# Altium PCB RFID_CC1101_433MHz.PcbDoc
Units mil, origin at the board's own origin, x right, y up, seen from the top; angles counter-clockwise.
Board outline 2125.98 x 2362.21 mil, 4 copper layers (Top Layer, GND Plane, POWER Plane, Bottom Layer), stack 16.312 mil thick; 97 components, 73 nets, 288 pads, 161 vias.
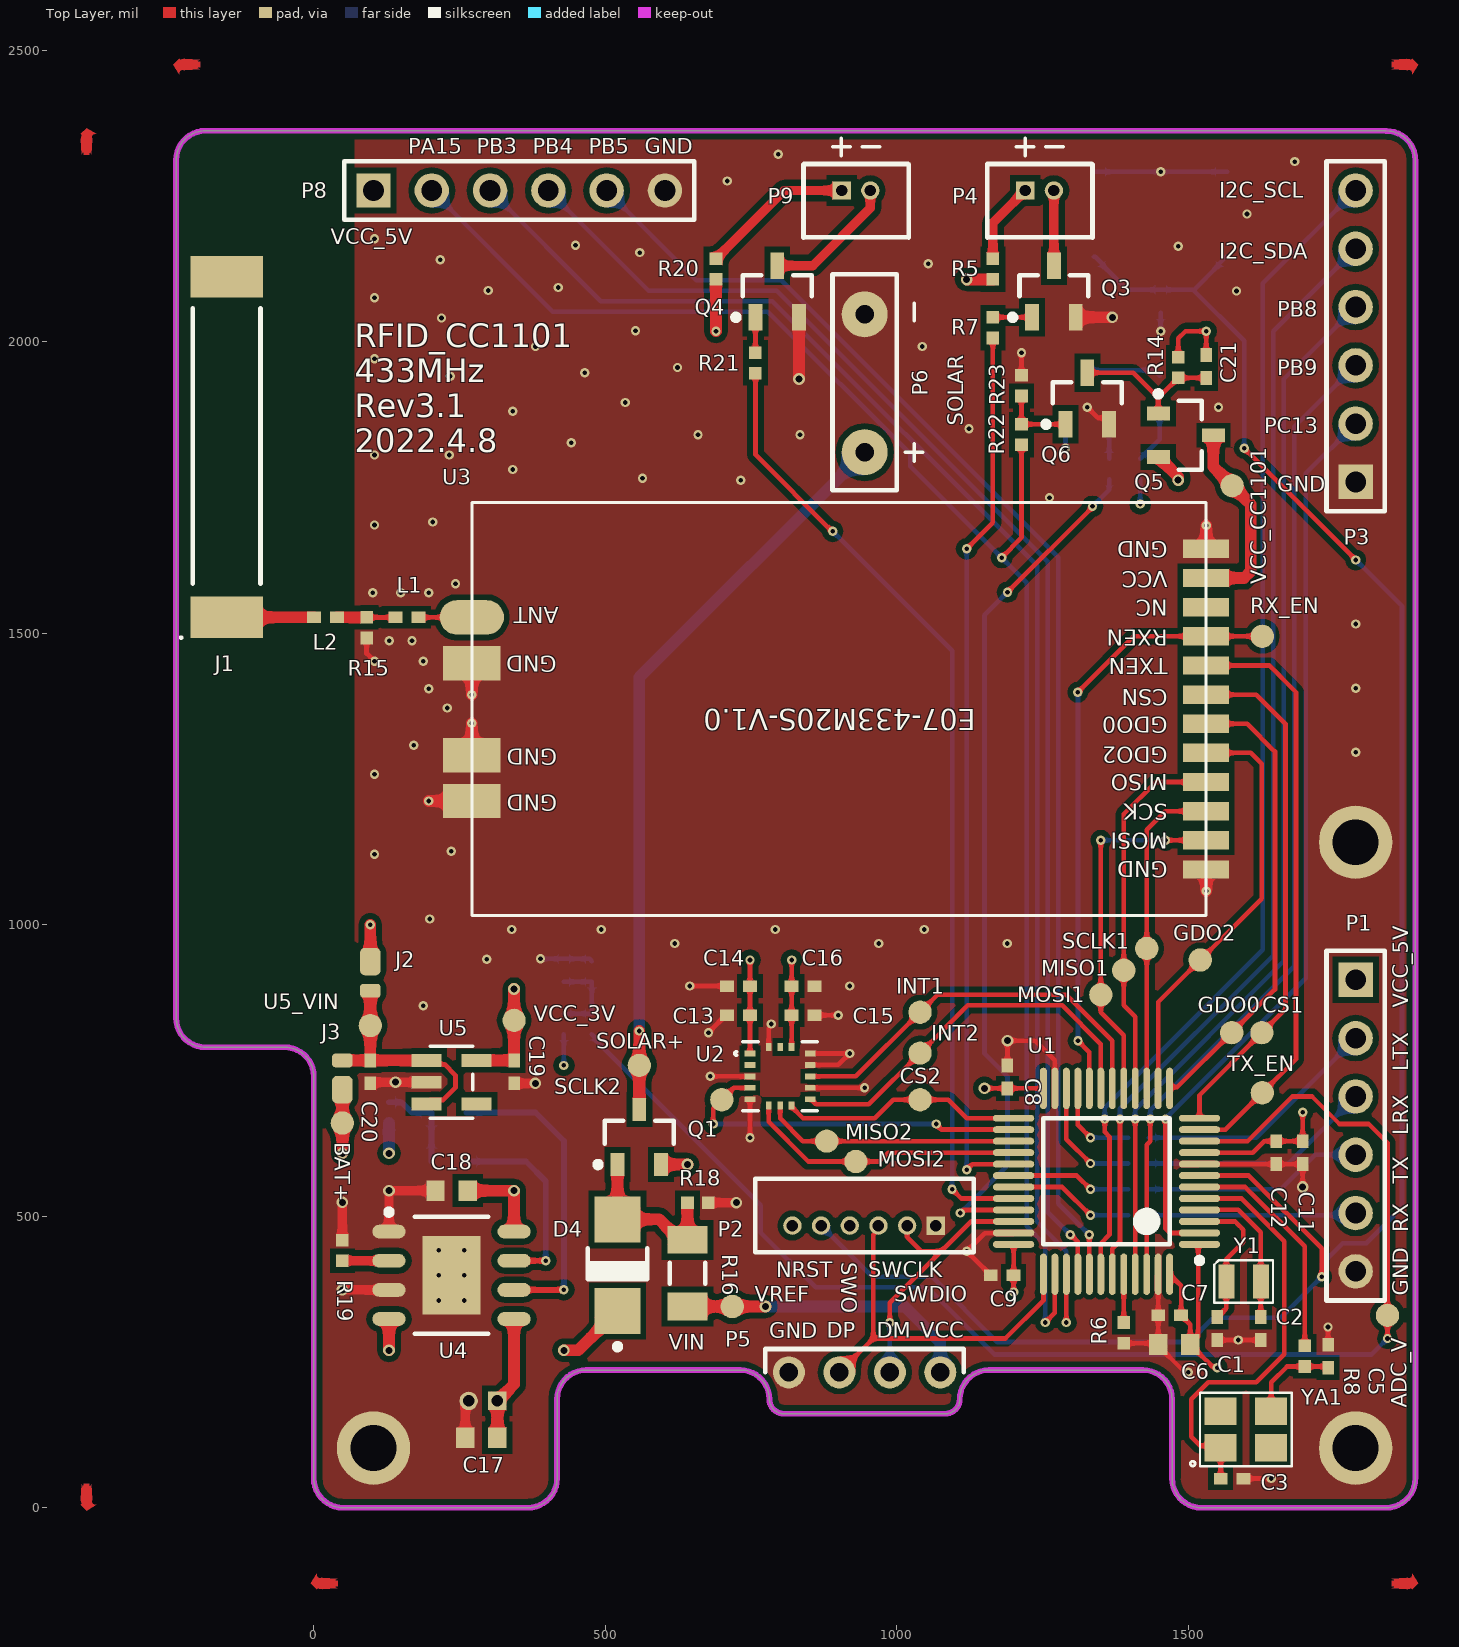
[diagram p0: Top Layer view]
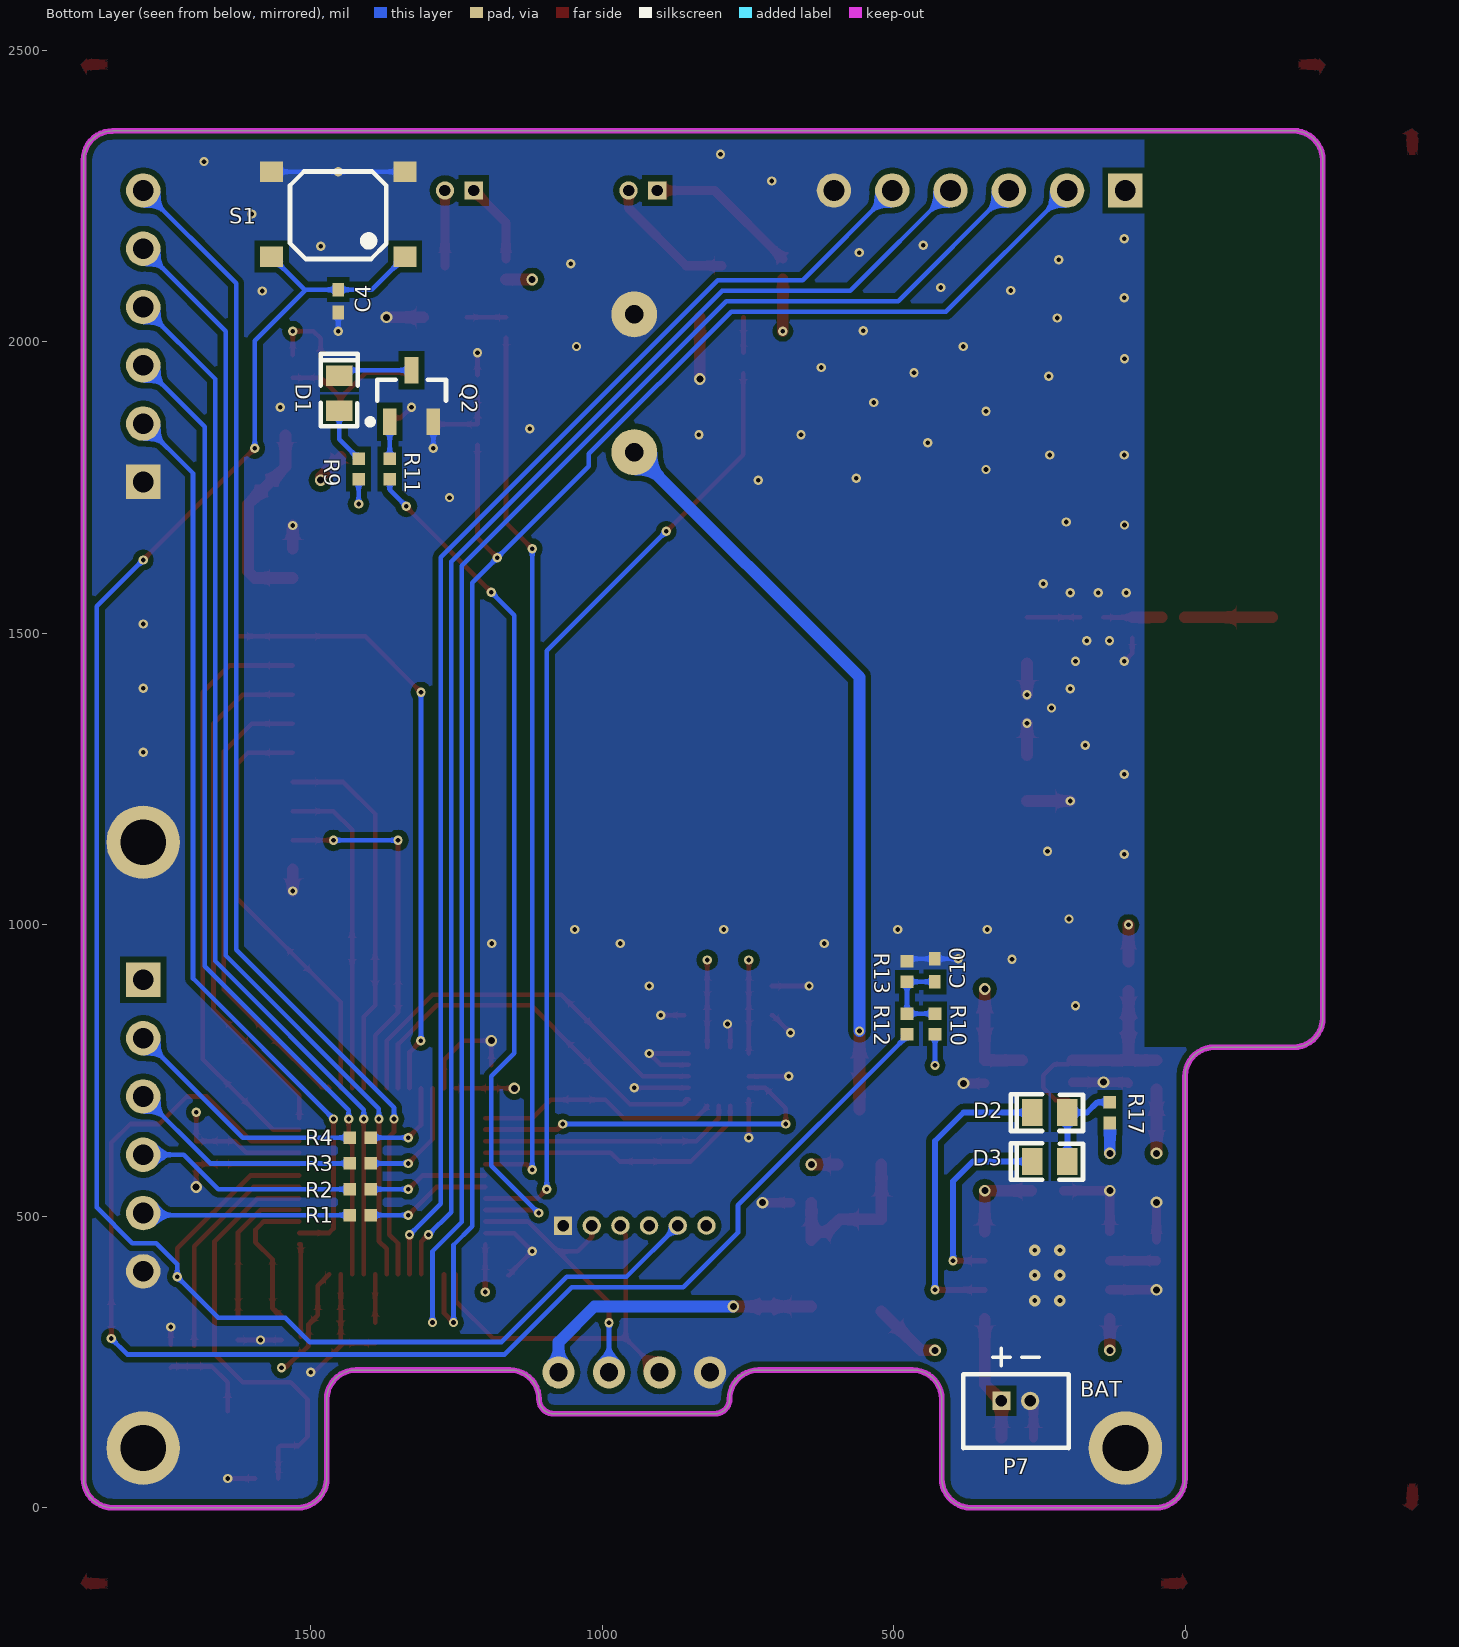
[diagram p1: Bottom Layer view, seen from below]
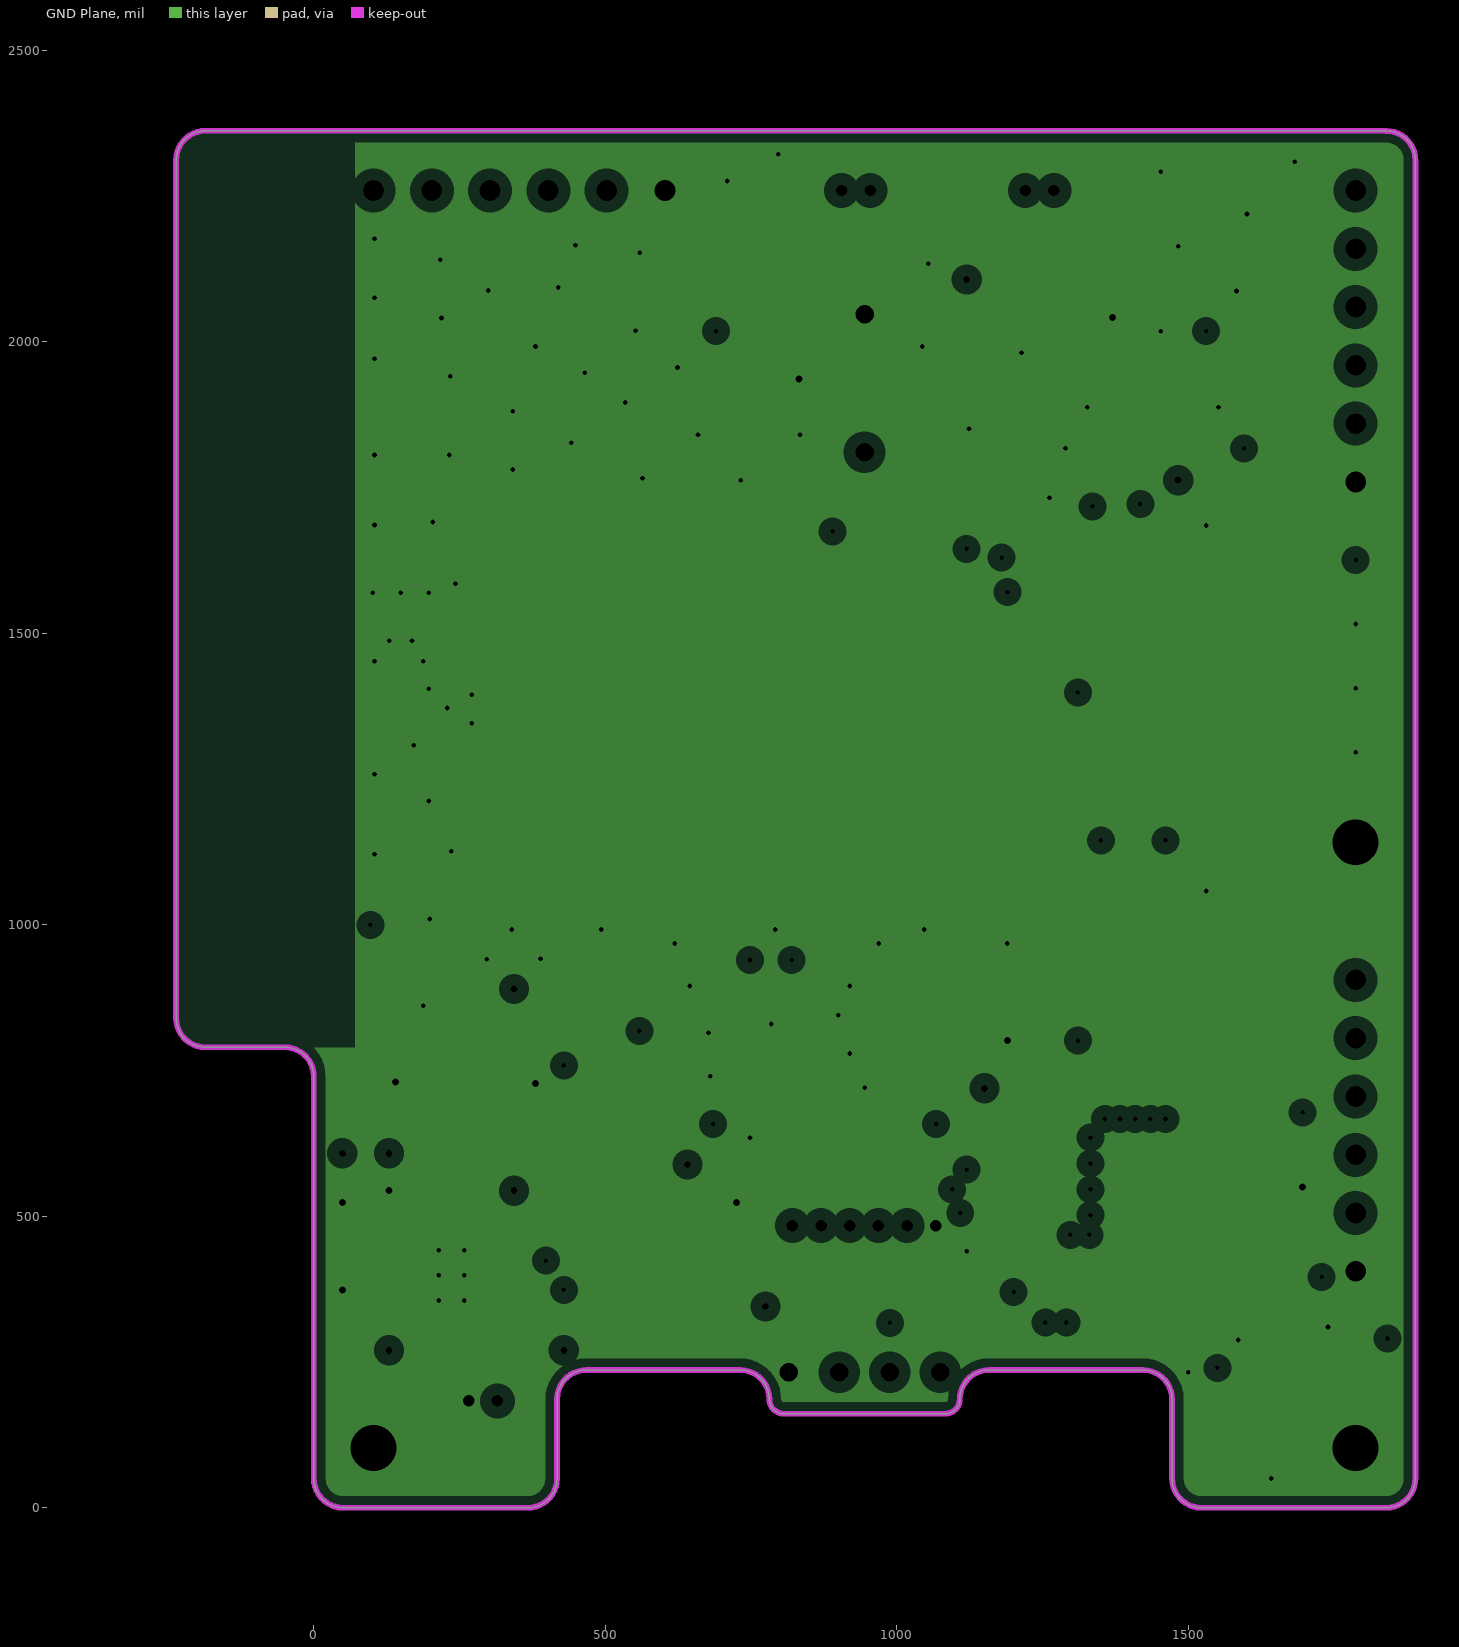
[diagram p2: GND Plane, clearances drawn from the general rule]
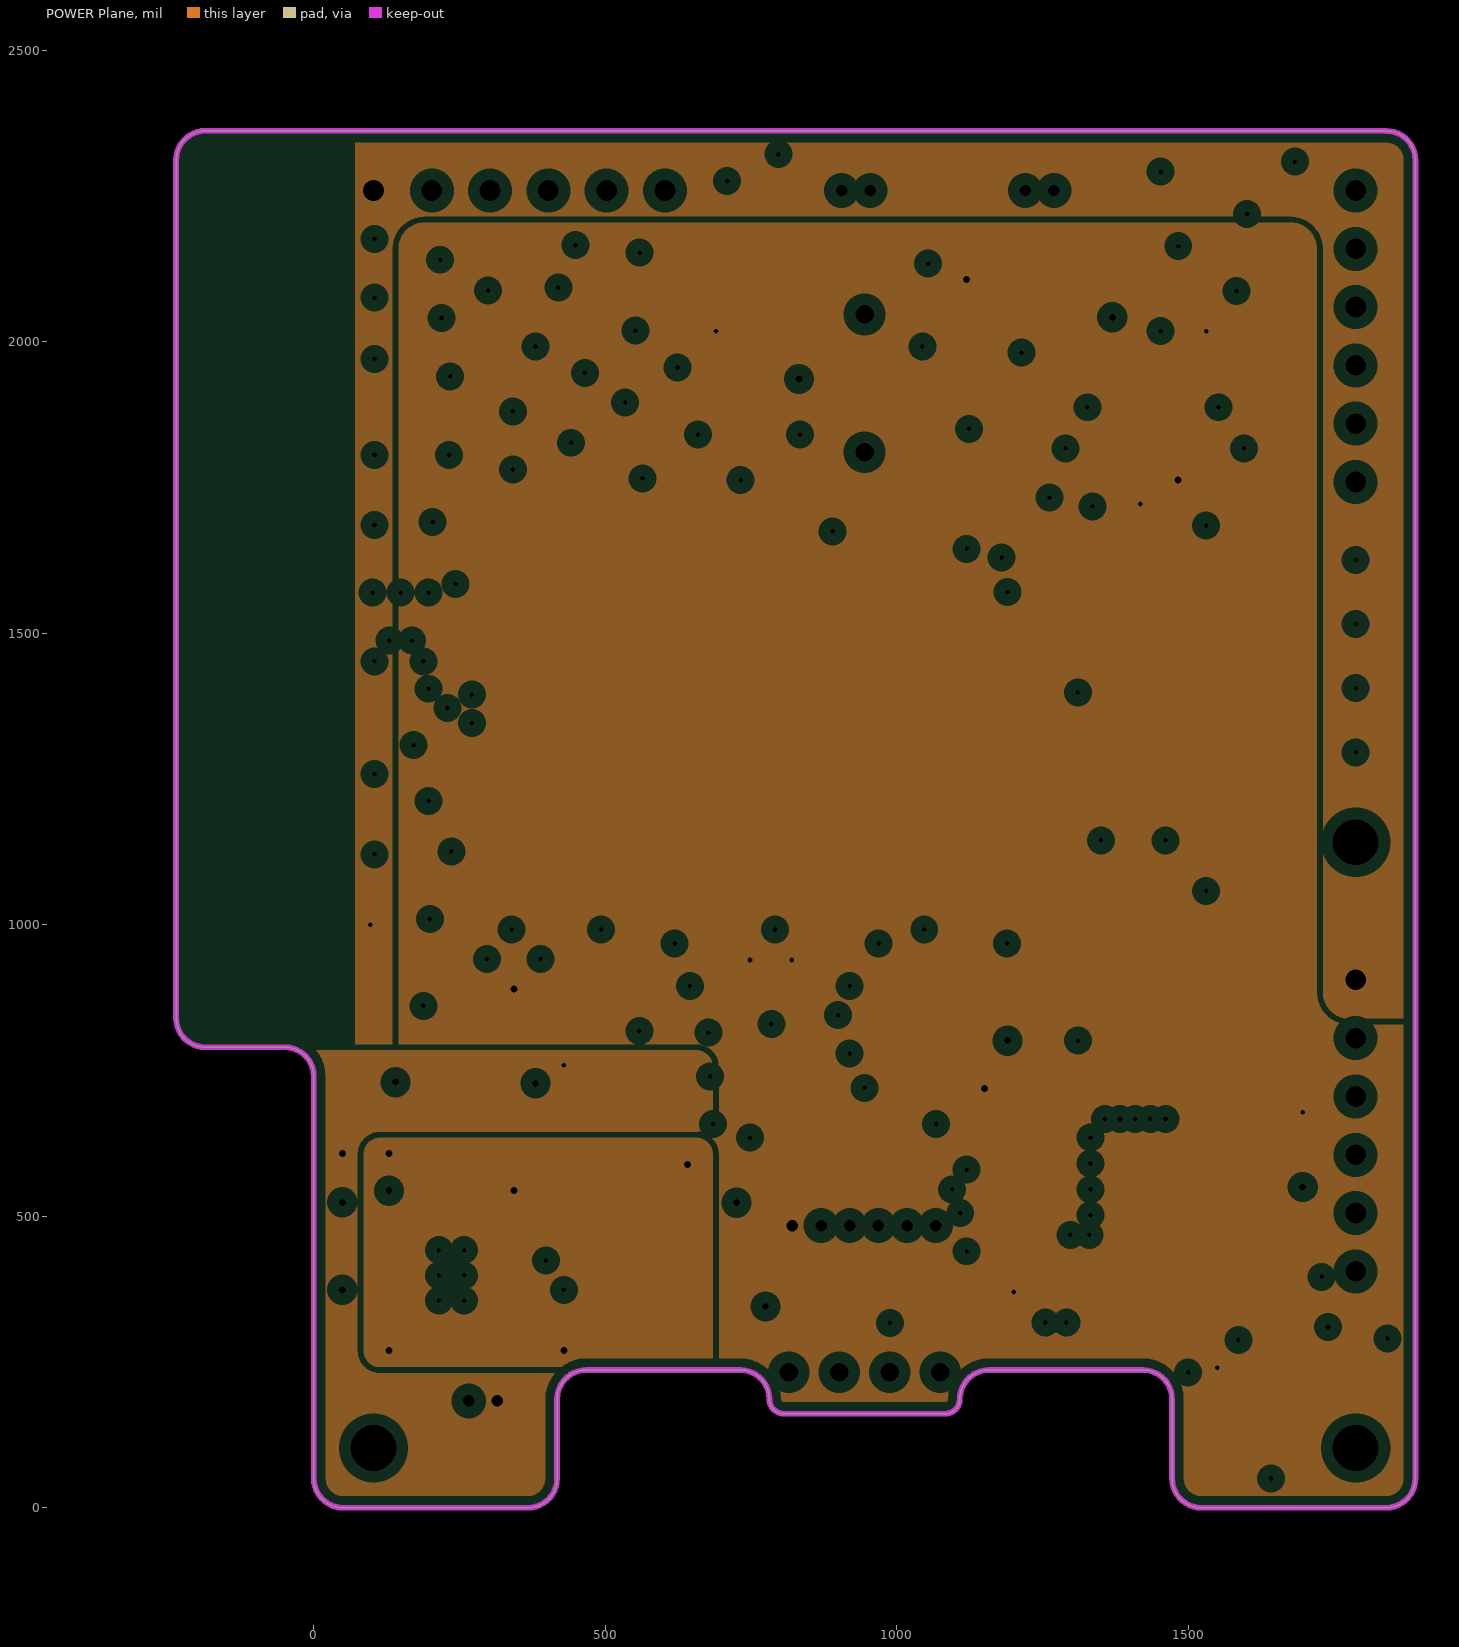
[diagram p3: POWER Plane, clearances drawn from the general rule]
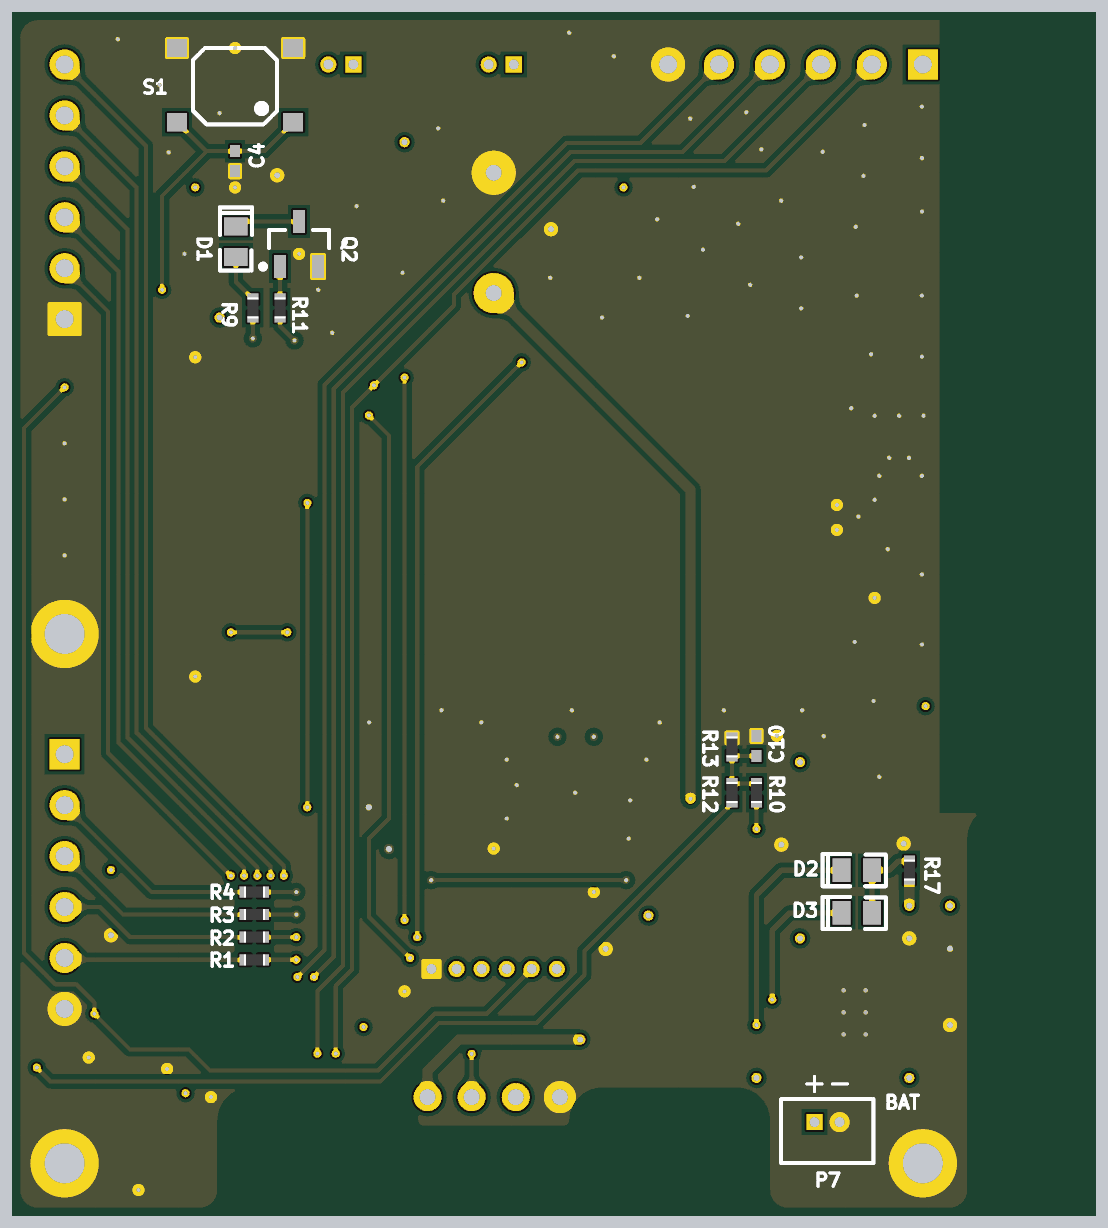
[diagram p4: 3D render of the assembled board from below, using the file's embedded part models]

## Layer stack, top to bottom
Top Solder: solder mask 0.4, Solder Resist, Dk 3.5
Top Layer: signal copper 1.3779
Dielectric 1: core 4, Core-009, Dk 4.5
GND Plane: plane copper 1.3779, net GND
Dielectric 3: prepreg 2.8, PP-006, Dk 4.1
POWER Plane: plane copper 1.3779, net (Multiple Nets)
Dielectric 2: core 4, Core-009, Dk 4.5
Bottom Layer: signal copper 1.3779
Bottom Solder: solder mask 0.4, Solder Resist, Dk 3.5

## Board outline
50,0 367.32,0 ccw(c367.32,50) 417.32,50 417.32,186.22 cw(c467.32,186.22) 467.32,236.22 731.5,236.22 cw(c731.5,186.22) 781.5,186.22 ccw(c806.5,186.22) 806.5,161.22 1083.27,161.22 ccw(c1083.27,186.22) 1108.27,186.22 cw(c1158.27,186.22) 1158.27,236.22 1422.44,236.22 cw(c1422.44,186.22) 1472.44,186.22 1472.44,50 ccw(c1522.44,50) 1522.44,0 1839.76,0 ccw(c1839.76,50) 1889.76,50 1889.76,2312.09 ccw(c1839.88,2312.21) 1840,2362.09 1840,2362.2 -186.22,2362.2 ccw(c-186.22,2312.2) -236.22,2312.2 -236.22,840 ccw(c-186.22,840) -186.22,790 -50,790 cw(c-50,740) 0,740 0,50 ccw(c50,50)

## Design rules (kind name [scope] priority, off if disabled: settings)
Clearance Clearance_8mil [(IsPad and InComponent('U1')) or (IsPad and InComponent('U2'))] p1: gap=8 ignorepadtopadclearanceinfootprint=TRUE
Clearance [All] p2: gap=10 ignorepadtopadclearanceinfootprint=FALSE except(0: Arc-Hole Track-Hole SMDPad-Hole THPad-Hole Via-Hole Fill-Hole Poly-Hole Region-Hole Text-Hole)
MinimumSolderMaskSliver [All] p1: minsoldermaskwidth=1
PlaneClearance [All] p1: clearance=20
PlaneConnect [All] p1: planeconnectstyle=Direct reliefexpansion=20 reliefentries=4 reliefconductorwidth=10 reliefairgap=10
PolygonConnect [All] p1: connectstyle=Direct reliefconductorwidth=10 reliefentries=4 polygonreliefangle="90 Angle" airgapwidth=10
RoutingVias [All] p1: holewidth=12 width=20 viastyle="Through Hole" minholewidth=8 minwidth=16 maxholewidth=28 maxwidth=50
SilkToSilkClearance [All] p1: silktosilkclearance=5
SilkToSolderMaskClearance [IsPad] p1: minsilkscreentomaskgap=0 clearancetoexposedcopper=TRUE
SolderMaskExpansion [All] p1: expansion=4 istentingtop=FALSE
Width Width_LED [InNetClass('led class')] p1: maxlimit=20 minlimit=8 preferedwidth=16
Width "Width Power" [InNetClass('power class')] p2: maxlimit=20 minlimit=8 preferedwidth=20
Width [All] p3: maxlimit=40 minlimit=8 preferedwidth=10
25 further rules are at their usual default settings.

## Classes and differential pairs
net class "led class": NetP4_1 NetP4_2 NetP9_1 NetP9_2
net class "power class": BAT+ GND NetC20_2 NetP4_2 NetP5_1 NetR19_2 SOLAR+ VCC VCC_3V VCC_5V
component class Power: BAT+ C17 C18 C19 C20 D2 D3 D4 J2 J3 P5 P6 P7 Q1 R16 R17 R18 R19 SOLAR+ U4 U5 U5_VIN VCC_3V VIN
component class MEMS&RF: C13 C14 C15 C16 J1 L2 R15 U2 U3
component class MCU: ADC_V C1 C2 C3 C4 C5 C6 C7 C8 C9 C10 C11 C12 CS1 CS2 D1 GDO0 GDO2 INT1 INT2 MISO1 MISO2 MOSI1 MOSI2 P1 P2 P3 P4 P8 P9 Q2 Q3 Q4 R1 R2 R3 R4 R5 R6 R7 R8 R9 R10 R11 R12 R13 R20 R21 RX_EN S1 SCLK1 SCLK2 TX_EN U1 Y1 YA1

## Components (designator, comment, footprint, x,y, rotation, side; value= is the part's Value field where it differs from the comment)
ADC_V "TP-EMB-SMT-Single-20mil-1pin" EMB-SMT-40MILX40MIL 1842,330 r90 top
BAT+ "TP-EMB-SMT-Single-20mil-1pin" EMB-SMT-40MILX40MIL 49,660 r90 top
C1 "10pF" 0402 1550,307.3 r90 top
C2 "10pF" 0402 1624.63,307.3 r90 top
C3 "18pF" 0402 1575.49,50 r180 top
C4 "100nF" 0402 1452.76,2070 r90 bottom
C5 "18pF" 0402 1740,260 r270 top
C6 "10uF" 1608[0603] 1476.14,280 r0 top
C7 "100nF" 0402 1468.27,330 r0 top
C8 "100nF" 0402 1190,739.13 r270 top
C9 "100nF" 0402 1180.87,398.74 r0 top
C10 "100nF" 0402 429,921.97 r270 bottom
C11 "1uF" 0402 1696.4,609.21 r90 top
C12 "100nF" 0402 1651.18,609.21 r90 top
C13 "100nF" 0402 728.64,845 r180 top
C14 "1uF" 0402 728.64,895 r180 top
C15 "100nF" 0402 839.38,845 r0 top
C16 "1uF" 0402 839.38,895 r180 top
C17 "10uF" 1608[0603] 287.4,120 r0 top
C18 "10uF" 1608[0603] 236.22,544 r180 top
C19 "1uF" 0402 343.5,747.72 r90 top
C20 "1uF" 0402 96.99,747.72 r90 top
C21 "100nF" 0402 1530.92,1958.02 r270 top
CS1 "TP-EMB-SMT-Single-20mil-1pin" EMB-SMT-40MILX40MIL 1626.55,815 r90 top
CS2 "TP-EMB-SMT-Single-20mil-1pin" EMB-SMT-40MILX40MIL 1040,700 r90 top
D1 "Green" 0603/K 1451,1882 r90 bottom
D2 "Green" 0603/K 201.84,677.85 r0 bottom
D3 "Red" 0603/K 201.84,593.98 r0 bottom
D4 "SS24A" ONSC-SMA-2-403D-02_V 521,416.03 r90 top
GDO0 "TP-EMB-SMT-Single-20mil-1pin" EMB-SMT-40MILX40MIL 1574.73,815 r90 top
GDO2 "TP-EMB-SMT-Single-20mil-1pin" EMB-SMT-40MILX40MIL 1520.69,939.69 r90 top
INT1 "TP-EMB-SMT-Single-20mil-1pin" EMB-SMT-40MILX40MIL 1040,850 r90 top
INT2 "TP-EMB-SMT-Single-20mil-1pin" EMB-SMT-40MILX40MIL 1040,780 r90 top
J1 "CA-S01" CA-S01 -149.61,1821.77 r90 top
J2 "NC" "1608[0603] - JUMPER" 96.99,917.06 r270 top
J3 "0Ω" "1608[0603] - JUMPER" 49,737.4 r90 top
L1 "18nH" 0402 160,1527.48 r180 top
L2 "100nH" 0402 20,1527.48 r180 top
MISO1 "TP-EMB-SMT-Single-20mil-1pin" EMB-SMT-40MILX40MIL 1389.53,922 r90 top
MISO2 "TP-EMB-SMT-Single-20mil-1pin" EMB-SMT-40MILX40MIL 880,629 r90 top
MOSI1 "TP-EMB-SMT-Single-20mil-1pin" EMB-SMT-40MILX40MIL 1350.16,880 r90 top
MOSI2 "TP-EMB-SMT-Single-20mil-1pin" EMB-SMT-40MILX40MIL 930,593.98 r90 top
P1 "A2541WV-6P" A2541WV-6P 1787.4,905.51 r270 top
P2 "A1251WV-6P" A1251WV-6P-SWD 1067.09,484 r180 top
P3 "A2541WV-6P" A2541WV-6P 1787.4,1759.84 r90 top
P4 "A1251WV-2P" A1251WV-2P 1220.47,2259.84 r0 top
P5 "LBX0062A" LBX0062A 1074.8,232.28 r180 top
P6 "SOLAR-PAD" SOLAR-PAD 944.88,1811.02 r90 top
P7 "A1251WV-2P" A1251WV-2P 314.96,183.23 r180 bottom
P8 "A2541WV-6P" A2541WV-6P 102.36,2259.84 r0 top
P9 "A1251WV-2P" A1251WV-2P 905.51,2259.84 r0 top
Q1 "YJL2301CQ" SOT95P237X112-3N 558.39,635.98 r90 top
Q2 "S8050" SOT-23B_N 1327,1907.31 r90 bottom
Q3 "S8050" SOT-23B_N 1269.68,2086.61 r90 top
Q4 "S8050" SOT-23B_N 795,2086.61 r90 top
Q5 "YJL2301CQ" SOT95P237X112-3N 1496,1840 r0 top
Q6 "S8050" SOT-23B_N 1327,1903.06 r90 top
R1 "33" RESC1005X04N 1415,502 r0 bottom
R2 "33" RESC1005X04N 1415,546.33 r180 bottom
R3 "33" RESC1005X04N 1415,590.67 r0 bottom
R4 "33" RESC1005X04N 1415,635 r0 bottom
R5 "1k" RESC1005X04N 1165,2125 r270 top
R6 "10k" RESC1005X04N 1389.53,300 r270 top
R7 "1k" RESC1005X04N 1165,2024.61 r90 top
R8 "390" RESC1005X04N 1700,260 r90 top
R9 "10k" RESC1005X04N 1417.85,1782 r270 bottom
R10 "1M" RESC1005X04N 429,830 r270 bottom
R11 "1k" RESC1005X04N 1364.4,1782 r90 bottom
R12 "0Ω" RESC1005X04N 477,830 r90 bottom
R13 "1M" RESC1005X04N 477,920.01 r270 bottom
R14 "100k" RESC1005X04N 1483,1956.05 r90 top
R15 "NC" RESC1005X04N 90.49,1509.76 r90 top
R16 "0.4" RESC3216X07N 641,402.28 r90 top
R17 "1k" RESC1005X04N 128.94,677.85 r90 bottom
R18 "10k" RESC1005X04N 658.72,523.32 r180 top
R19 "1.2k" RESC1005X04N 49,441.46 r270 top
R20 "1k" RESC1005X04N 690,2125 r270 top
R21 "1k" RESC1005X04N 757.6,1964 r90 top
R22 "2k" RESC1005X04N 1214,1841.05 r90 top
R23 "10k" RESC1005X04N 1214,1925 r270 top
RX_EN "TP-EMB-SMT-Single-20mil-1pin" EMB-SMT-40MILX40MIL 1627.31,1495 r90 top
S1 "DPST-4" DPST 1338.58,2146.39 r0 bottom
SCLK1 "TP-EMB-SMT-Single-20mil-1pin" EMB-SMT-40MILX40MIL 1428.9,959.47 r90 top
SCLK2 "TP-EMB-SMT-Single-20mil-1pin" EMB-SMT-40MILX40MIL 700,700 r90 top
SOLAR+ "TP-EMB-SMT-Single-20mil-1pin" EMB-SMT-40MILX40MIL 558.4,758.82 r90 top
TX_EN "TP-EMB-SMT-Single-20mil-1pin" EMB-SMT-40MILX40MIL 1627.31,711.94 r90 top
U1 "STM32L051C8T6" STM-LQFP48_N 1360,560 r180 top
U2 "ADXL362BCCZ" LGA_CC-16-4 800,740 r0 top
U3 "E07-433M20S" PE07-433M20S 901,1370 r180 top
U4 "TP4056" ESOP-9N 236.22,398.74 r0 top
U5 "ADP151AUJZ-3.0-R7" UJ_5 236.22,730 r0 top
U5_VIN "TP-EMB-SMT-Single-20mil-1pin" EMB-SMT-40MILX40MIL 96.99,827.23 r90 top
VCC_3V "TP-EMB-SMT-Single-20mil-1pin" EMB-SMT-40MILX40MIL 343.5,836.06 r90 top
VCC_CC1101 "TP-EMB-SMT-Single-20mil-1pin" EMB-SMT-40MILX40MIL 1575.43,1753.57 r90 top
VIN "TP-EMB-SMT-Single-20mil-1pin" EMB-SMT-40MILX40MIL 717.94,345.2 r90 top
Y1 "32.768 kHz" XTAL-2012 1565.58,388.12 r0 top
YA1 "12.0000000MHz" XTAL-SMT-4P 1555.8,102.66 r0 top

## Footprints (in the part's own frame and the unit in brackets; to place one, negate y for a bottom-side part, rotate by r counter-clockwise, add the part's x,y. Pads: shape width x height; smd on the part's side, far side on the other; paste and mask are expansions set on the pad)
0402 [mm] "Chip Capacitor, Body 1.0x0.5mm, IPC High Density"
  rect 0.6x0.5 smd: 1(-0.5,0) 2(0.5,0)
  body extent -0.55,-0.3 0.55,0.3, height 1.3
0603/K [mil]
  rect 35x46 smd: A(0,0) K(60,0)
  silkscreen extent -27,-31 97,31
1608[0603] [mm] "Chip Capacitor, Body 1.6x0.8mm, IPC High Density"
  rect 0.8x0.9 smd: 1(-0.7,0) 2(0.7,0)
  body extent -0.87,-0.48 0.87,0.48, height 1.3
"1608[0603] - JUMPER" [mm] "jumper, Body 1.6x0.8mm, IPC High Density"
  rrect50% 1.2x0.9 smd: 1(-0.508,0)
  rrect50% 0.6x0.9 smd: 2(0.762,0)
  body extent -0.87,-0.48 0.87,0.48, height 1.3
A1251WV-2P [mm] "Connector; Header; 2 Position"
  rect 0.8x0.8 hole 0.5: 1(0,0)
  round 0.8 hole 0.5: 2(1.25,0)
  silkscreen extent -1.66,-2.05 2.93,2.29
A1251WV-6P-SWD [mm] "Connector; Header; 6 Position"
  rect 0.8x0.8 hole 0.5: 1(0,0)
  round 0.8 hole 0.5: 2(1.25,0) 3(2.5,0) 4(3.75,0) 5(5,0) 6(6.25,0)
  silkscreen extent -1.66,-2.05 7.87,1.15
A2541WV-6P [mm] "Connector; Header; 6 Position"
  rect 1.5x1.5 hole 0.9: 1(0,0)
  round 1.5 hole 0.9: 2(2.54,0) 3(5.08,0) 4(7.62,0) 5(10.16,0) 6(12.7,0)
  silkscreen extent -1.27,-1.27 13.97,1.27
CA-S01 [mm] "CorssAir Antenna, 2-Leads, Body 15.00x3.00mm, IPC Medium Density"
  rect 1.8x3.15 smd: 1(-7.475,0) 2(7.375,0)
  silkscreen extent -8.41,-1.47 6,2.03, body extent -7.6,-1.55 7.6,1.55, height 0.25
DPST [mm]
  rect 1x0.9 smd: 1(0,0) 2(5.8,0) 3(0,-3.7) 4(5.8,-3.7)
  silkscreen extent 0.81,-3.71 5,0.1
EMB-SMT-40MILX40MIL [mil] "testpoint"
  round 40 smd: 1(0,0)
ESOP-9N [mm] "ESOP, 8-Leads, Body 4.90x3.90mm, Pitch 1.27mm, Thermal Pad 3.41x2.52mm, IPC Medium Density, For TP4056"
  oval 1.45x0.6 smd: 1(-2.725,1.905) 2(-2.725,0.635) 3(-2.725,-0.635) 4(-2.725,-1.905) 5(2.725,-1.905) 6(2.725,-0.635) 7(2.725,0.635) 8(2.725,1.905)
  rect 2.52x3.41 smd: 9(0,0)
  silkscreen extent -2.85,-2.55 1.6,2.88, body extent -3,-2.55 3,2.55, height 1.75
LBX0062A [mm] "PogoPin; Connector; 4 Position"
  round 1.4 hole 0.8: 1(0,0) 2(2.2,0) 3(4.4,0) 4(6.6,0)
  silkscreen extent -1.02,-1.02 7.62,0
LGA_CC-16-4 [mm]
  rect 0.475x0.25 smd: 1(-1.313,1) 2(-1.313,0.5) 3(-1.313,0) 4(-1.313,-0.5) 5(-1.313,-1) 9(1.313,-1) 10(1.313,-0.5) 11(1.313,0) 12(1.313,0.5) 13(1.313,1)
  rect 0.25x0.35 smd: 6(-0.5,-1.275) 7(0,-1.275) 8(0.5,-1.275) 14(0.5,1.275) 15(0,1.275) 16(-0.5,1.275)
  silkscreen extent -1.98,-1.5 1.63,1.5, body extent 0,0 0.25,0.25, height 0.25
ONSC-SMA-2-403D-02_V [mm] "Molded, 2-Leads, Body 4.57x2.92mm"
  rect 2x2 smd: 1(-2,0) 2(2,0)
  silkscreen extent -3.67,-1.3 0.74,1.3, body extent -2.16,-1.3 2.16,1.3, height 2.2
PE07-433M20S [mm] "32mm*18mm*3.0mm-S"
  rect 2x0.8 smd: 1(-16,6.985) 2(-16,5.715) 3(-16,4.445) 4(-16,3.175) 5(-16,1.905) 6(-16,0.635) 7(-16,-0.635) 8(-16,-1.905) 9(-16,-3.175) 10(-16,-4.445) 11(-16,-5.715) 12(-16,-6.985)
  oval 2.8x1.5 smd: 13(16,-4)
  rect 2.5x1.5 smd: 14(16,-2) 15(16,2) 16(16,4)
  silkscreen extent -16,-9 16,9
RESC1005X04N [mm] "Chip Resistor, 2-Leads, Body 1.00x0.50mm, IPC Medium Density"
  rect 0.55x0.55 smd: 1(-0.45,0) 2(0.45,0)
  body extent -0.53,-0.28 0.53,0.28, height 0.4
RESC3216X07N [mm] "Chip Resistor, 2-Leads, Body 3.20x1.60mm, IPC Medium Density"
  rect 1.2x1.75 smd: 1(-1.45,0) 2(1.45,0)
  silkscreen extent -0.45,-0.77 0.45,0.77, body extent -1.7,-0.87 1.7,0.87, height 0.65
SOLAR-PAD [mm] "Connector; Header; 2 Position"
  round 2 hole 0.8: 1(0,0) 2(6,0)
  silkscreen extent -1.66,-2.54 7.75,1.4
SOT95P237X112-3N [mm] "SOT23, 3-Leads, Body 2.92x2.37mm, Pitch 0.95mm, IPC Medium Density"
  rect 1x0.6 smd: 1(-1.2,0.95) 2(-1.2,-0.95) 3(1.2,0)
  silkscreen extent -1.32,-1.5 0.7,1.92, body extent -1.32,-1.52 1.32,1.52, height 1.12
SOT-23B_N [mm] "SOT23, 3-Leads, Body 2.9x1.3mm, Pitch 0.95mm, Lead Span 2.4mm, IPC Medium Density"
  rect 1.15x0.6 smd: B(-1.125,0.95) C(1.125,0) E(-1.125,-0.95)
  silkscreen extent -1.25,-1.5 0.7,1.93, body extent -0.7,-1.5 0.7,1.5, height 1.14
STM-LQFP48_N [mm] "QFP, 48-Leads, Body 7x7mm, Pitch 0.5mm, IPC Medium Density"
  oval 1.8x0.3 smd: 1(-4.05,2.75) 2(-4.05,2.25) 3(-4.05,1.75) 4(-4.05,1.25) 5(-4.05,0.75) 6(-4.05,0.25) 7(-4.05,-0.25) 8(-4.05,-0.75) 9(-4.05,-1.25) 10(-4.05,-1.75) 11(-4.05,-2.25) 12(-4.05,-2.75) 25(4.05,-2.75) 26(4.05,-2.25) 27(4.05,-1.75) 28(4.05,-1.25) 29(4.05,-0.75) 30(4.05,-0.25) 31(4.05,0.25) 32(4.05,0.75) 33(4.05,1.25) 34(4.05,1.75) 35(4.05,2.25) 36(4.05,2.75)
  oval 0.3x1.8 smd: 13(-2.75,-4.05) 14(-2.25,-4.05) 15(-1.75,-4.05) 16(-1.25,-4.05) 17(-0.75,-4.05) 18(-0.25,-4.05) 19(0.25,-4.05) 20(0.75,-4.05) 21(1.25,-4.05) 22(1.75,-4.05) 23(2.25,-4.05) 24(2.75,-4.05) 37(2.75,4.05) 38(2.25,4.05) 39(1.75,4.05) 40(1.25,4.05) 41(0.75,4.05) 42(0.25,4.05) 43(-0.25,4.05) 44(-0.75,4.05) 45(-1.25,4.05) 46(-1.75,4.05) 47(-2.25,4.05) 48(-2.75,4.05)
  silkscreen extent -4.18,-2.75 2.75,3.57, body extent -3.5,-3.5 3.5,3.5, height 1.6
UJ_5 [mil] "5P,TSOT for ADP151AUJZ"
  rect 52x22 smd paste+0 mask+0: 1(-43,37.4) 2(-43,0) 3(-43,-37.4) 4(43,-37.4) 5(43,37.4)
  silkscreen extent -36,-62 36,62, body extent -55,-57 55,57, height 39
XTAL-2012 [mm] "NX2012SA, 2 pins, 2.0mmx1.2mm."
  rect 0.7x1.5 smd: 1(0,0) 2(1.5,0)
  silkscreen extent -0.53,-0.92 2.03,0.92
XTAL-SMT-4P [mm] "3225, 3.2mmx2.5mm"
  rect 1.4x1.2 smd: 1(0,0) 2(2.2,0) 3(2.2,1.6) 4(0,1.6)
  silkscreen extent -1.32,-0.8 3.1,2.4

## Part data
ADC_V BAT+ CS1 CS2 GDO0 GDO2 INT1 INT2 MISO1 MISO2 MOSI1 MOSI2 RX_EN SCLK1 SCLK2 SOLAR+ TX_EN U5_VIN VCC_3V VCC_CC1101 VIN: "Test Point Designed for holding a standard probe lead"
C1 C2: library part CC0402FRNPO9BN100, "Capacitor (0402,NPO,10pF,DC 50V,±1%) YAGEO", LatestRevisionDate=29-May-2009, LatestRevisionNote="IPC-7351 Footprint Added.", PackageDescription="Chip Capacitor", PackageReference=C0402, Published=8-Jun-2000, Publisher="Altium Limited"
C3 C5: library part CC0402FRNPO9BN180, "Capacitor (0402,NPO,18pF,DC 50V,±1%) YAGEO", LatestRevisionDate=29-May-2009, LatestRevisionNote="IPC-7351 Footprint Added.", PackageDescription="Chip Capacitor", PackageReference=C0402, Published=8-Jun-2000, Publisher="Altium Limited"
C4 C7 C8 C9 C10 C12 C13 C15 C21: library part GRM155R71H104KE14, "Capacitor (0402,X7R,100nF,DC 50V,±10%) Murata", LatestRevisionDate=29-May-2009, LatestRevisionNote="IPC-7351 Footprint Added.", PackageDescription="Chip Capacitor", PackageReference=C0402, Published=8-Jun-2000, Publisher="Altium Limited"
C6 C17 C18: library part GRM188R61E106MA73, "Capacitor(0603,X5R(EIA),10uF,DC 25V,+/-20 %) muRata", LatestRevisionDate=29-May-2009, LatestRevisionNote="IPC-7351 Footprint Added.", PackageDescription="Chip Capacitor", PackageReference=C0603, Published=8-Jun-2000, Publisher="Altium Limited"
C11 C14 C16 C19 C20: library part GRM155R61E105KE11, "Capacitor (0402,X5R,1uF,DC 25V,±10%) Murata", LatestRevisionDate=29-May-2009, LatestRevisionNote="IPC-7351 Footprint Added.", PackageDescription="Chip Capacitor", PackageReference=C0402, Published=8-Jun-2000, Publisher="Altium Limited"
D1 D2: library part XL-1608SYGC, "Standard 0603 SMD LED, Green, 1.6-2.2V", LatestRevisionDate=17-Jul-2002, LatestRevisionNote="Re-released for DXP Platform.", PackageDescription="SM LED; 2 Flat Leads", PackageReference=0603, PackageVersion=Feb-2002, Published=8-Jun-2000, Publisher="Altium Limited", Valid=Green
D3: library part XL-1608SURC, "Standard 0603 SMD LED, Red, 1.6-2.2V", LatestRevisionDate=17-Jul-2002, LatestRevisionNote="Re-released for DXP Platform.", PackageDescription="SM LED; 2 Flat Leads", PackageReference=0603, PackageVersion=Feb-2002, Published=8-Jun-2000, Publisher="Altium Limited", Valid=Red
D4: "Surface Mount Schottky Rectifier, 2-Pin SMA, VRRM=40V , VF=0.5V at IF=2.0A, -55~+125°C", Manufacturer=扬州扬杰电子科技股份有限公司, ComponentLink1Description="Manufacturer URL", ComponentLink1URL=https://www.vishay.com, ComponentLink2Description=Datasheet, ComponentLink2URL=https://www.vishay.com/product?docid=89008, ComponentLink3Description="Package Specification", ComponentLink3URL=http://www.vishay.com/docs/88869/packaging.pdf, Configuration=Single, IFSM Max (A)=50, Mounting Technology="Surface Mount", PackageDescription="2-Pin Small Molded Package, J-Bend Lead, Body 2.605 x 4.315 mm", PackageReference="DO-214AC (SMA)", Packing="Tape and Reel", PartNumber=SS24A, RoHS=TRUE, VRRM(V)=40
J1: "CrossAir Antenna，广州寒武纪电子科技有限公司", LatestRevisionDate=17-Jul-2002, LatestRevisionNote="Re-released for DXP Platform.", Publisher="Altium Limited"
J2 J3: library part RC0603JR-JUMP, "Resistor 0603(1608) 0Ω jumper", PackageDescription="Chip Resistor, 2-Leads, Body 1.60x0.80mm, IPC Medium Density", PackageReference=0603
L1: library part LQW15AN18NJ00, "Inductor, 18n, 0402, ±5%, wire-wound type Murata", LatestRevisionDate=29-May-2009, LatestRevisionNote="IPC-7351 Footprint Added.", PackageDescription=Inductor, PackageReference=0402, Published=8-Jun-2000, Publisher="Altium Limited"
L2: library part LQW15ANR10J00, "Inductor, 100n, 0402, ±5%, wire-wound type Murata", LatestRevisionDate=29-May-2009, LatestRevisionNote="IPC-7351 Footprint Added.", PackageDescription=Inductor, PackageReference=0402, Published=8-Jun-2000, Publisher="Altium Limited"
P1 P3 P8: "Header, 6-Pin, 针座-2.54mm间距，180度，DIP排针", LatestRevisionDate=17-Jul-2002, LatestRevisionNote="Re-released for DXP Platform.", Publisher="Altium Limited"
P2: "Header, 6-Pin, 1.25mm PITCH, 180° WAFER", LatestRevisionDate=17-Jul-2002, LatestRevisionNote="Re-released for DXP Platform.", Publisher="Altium Limited"
P4 P7 P9: "Header, 2-Pin, 1.25mm PITCH, 180° WAFER", LatestRevisionDate=17-Jul-2002, LatestRevisionNote="Re-released for DXP Platform.", Publisher="Altium Limited"
P5: "PogoPinLBX0062A, 4-Pin", LatestRevisionDate=17-Jul-2002, LatestRevisionNote="Re-released for DXP Platform.", Publisher="Altium Limited"
P6: "Header, 2-Pin", LatestRevisionDate=17-Jul-2002, LatestRevisionNote="Re-released for DXP Platform.", Publisher="Altium Limited"
Q1: "P-Channel Enhancement Mode Field Effect Transistor,VDS=-20V,VGS=±10V,ID=-3.4A,VGS(th)Min=-0.4V,SOT-23", LatestRevisionDate=17-Jul-2002, LatestRevisionNote="Re-released for DXP Platform.", PackageDescription="SOT23, 3-Leads, Body 2.92x2.37mm, Pitch 0.95mm, IPC Medium Density", PackageReference=SOT23, PackageVersion=1995/1996, Published=8-Jun-2000, Publisher="Altium Limited"
Q2 Q3 Q4 Q6: "NPN General Purpose Amplifier, -55 to +150°C", Manufacturer=扬州扬杰电子科技股份有限公司, Package=SOT-23, IC(mA)=500, PC(mW)=300, VCBO(V)=40, VCEO(V)=25, VEBO(V)=5
Q5: "P-Channel Enhancement Mode Field Effect Transistor, VDS=-20V, VGS=±10V, ID=-3.4A, VGS(th)Min=-0.4V, SOT-23, YANGJIE", LatestRevisionDate=17-Jul-2002, LatestRevisionNote="Re-released for DXP Platform.", PackageDescription="SOT23, 3-Leads, Body 2.92x2.37mm, Pitch 0.95mm, IPC Medium Density", PackageReference=SOT23, PackageVersion=1995/1996, Published=8-Jun-2000, Publisher="Altium Limited"
R1 R2 R3 R4: library part RC0402FR-0733RL, "Resistor 0402(1005) 33Ω ±1%", PackageDescription="Chip Resistor, 2-Leads, Body 1.00x0.50mm, IPC Medium Density", PackageReference=0402
R5 R7 R11 R17 R20 R21: library part RC0402FR-071KL, "Resistor 0402(1005) 1kΩ ±1%", PackageDescription="Chip Resistor, 2-Leads, Body 1.00x0.50mm, IPC Medium Density", PackageReference=0402
R6 R9 R18 R23: library part RC0402FR-0710KL, "Resistor 0402(1005) 10kΩ ±1%", PackageDescription="Chip Resistor, 2-Leads, Body 1.00x0.50mm, IPC Medium Density", PackageReference=0402
R8: library part RC0402FR-07390RL, "Resistor 0402(1005) 390Ω ±1%", PackageDescription="Chip Resistor, 2-Leads, Body 1.00x0.50mm, IPC Medium Density", PackageReference=0402
R10 R13: library part RC0402FR-071ML, "Resistor 0402(1005) 1MΩ ±1%", PackageDescription="Chip Resistor, 2-Leads, Body 1.00x0.50mm, IPC Medium Density", PackageReference=0402
R12 R15: library part RC0402JR, "Resistor 0402(1005) 0Ω", PackageDescription="Chip Resistor, 2-Leads, Body 1.00x0.50mm, IPC Medium Density", PackageReference=0402
R14: library part RC0402FR-07100KL, "Resistor 0402(1005) 100kΩ ±1%", PackageDescription="Chip Resistor, 2-Leads, Body 1.00x0.50mm, IPC Medium Density", PackageReference=0402
R16: library part PE1206FRF470R4L, "Resistor 1206(3216) 0.4Ω ±1% 1W AUTOMOTIVE GRADEPE_L series", PackageDescription="Chip Resistor, 2-Leads, Body 3.20x1.60mm, IPC Medium Density", PackageReference=1206
R19: library part RC0402FR-071K2L, "Resistor 0402(1005) 1.2kΩ ±1%", PackageDescription="Chip Resistor, 2-Leads, Body 1.00x0.50mm, IPC Medium Density", PackageReference=0402
R22: library part RC0402FR-072KL, "Resistor 0402(1005) 2kΩ ±1%", PackageDescription="Chip Resistor, 2-Leads, Body 1.00x0.50mm, IPC Medium Density", PackageReference=0402
S1: library part CX-G001, "5.2*5.2轻触开关", LatestRevisionDate=17-Jul-2002, LatestRevisionNote="Re-released for DXP Platform.", PackageDescription="Switch; 4 Leads", PackageReference=DPST-4, Published=24-Mar-1999, Publisher="Altium Limited"
U1: "Access line ultra-low-power 32-bit MCU Arm®-based Cortex®-M0+, 64 KB Flash, 8 KB SRAM,2 KB EEPROM, 38 fast I/Os, 48-pin LQFP, -40 to 125 degC, Tray", I/Os (High Current)=37, Operating Frequency(F) (Processor speed) (MHz)=32, Supplier Part Number 1=497-11517-ND, Supply Voltage(Vcc) min (V)=2, A/D Converter=2x12-bit, ComponentLink1Description="Manufacturer URL", ComponentLink1URL=http://www.st.com/web/en/home.html, ComponentLink2Description=Datasheet, ComponentLink2URL=http://www.st.com/st-web-ui/static/active/en/resource/technical/document/datasheet/CD00161566.pdf, ComponentLink3Description="Package Specification", ComponentLink3URL=http://www.st.com/st-web-ui/static/active/en/resource/technical/document/datasheet/DM00058181.pdf, Core="ARM Cortex-M0+", DatasheetVersion="Rev. 16", FLASH Size (Prog) (kB)=64, Internal RAM Size (kB)=20, Mounting Technology="Surface Mount", PackageDescription="48-Pin Low Profile Quad Flat Package, 7 x 7 mm Body, 0.5 mm Pitch", PackageReference=LQFP48, PackageVersion="Rev. 6, 06/2013", Packing=Tray, PartNumber=STM32L051C8T6, Supplier 1=Digi-Key, Supplier 2=Farnell, Supplier 3=Newark, Supplier 4=Mouser, Supplier Part Number 2=1899017, Supplier Part Number 3=72T2644, Supplier Part Number 4=511-STM32L051C8T6
U2: "ADXL362, LGA, CC-16-4."
U3: "E07-433M20S是基于美国原装进口CC1101由成都亿佰特设计生产的大功率CC1101无线模块，默认发射功率为100mW、内置PA的模块，做到了功耗与性能的平衡。SPI接口，收发一体，可以工作在433MHz主流ISM频段，支持开发低功耗，目前已经多种场景中广泛应用", frequency(MHz)=433, Iout(max)(mA)=100, Isupply(uA)=2, Vin(V)=2.1-3.6
U4: "1A线性锂离子电池充电器"
U5: library part ADP151, "The ADP151 is an ultralow noise, low dropout (LDO) linear regulator that operates from 2.2 V to 5.5 V and provides up to 200 mA of output current.", Dropout Voltage(mV)=140, Iout(max)(mA)=200, Isupply(uA)=10, RMS Niose(uV)=9, Vin(V)=2.2-5.5, Vout(V)="1.1, 1.2, 1.5, 1.8, 2.1, 2.5, 2.6, 2.75, 2.8, 2.85, 3.0, 3.3"
Y1: library part 7RC32768F12UC, "Crystal Oscillator, 2.0×1.2×0.6 mm, 2 Pins, 32.768kHz, -40°C~+85°C, 12pF", Frequency Tolerance="±5ppm, ±10ppm, ±20ppm (max.) at 25°C", Load Capacitance=12pF, Manufacturer=SJK, Operating Temperature Range="Re-released for DXP Platform.", Package size (L×W×H)="2.0×1.2×0.60 mm", Frequency Range="32.768 kHz", PackageReference=-40°C~+85°C
YA1: library part 7U12000E12UCG, "Crystal Oscillator, 3.2×2.5×0.70 mm, 4 Pins, 12.000MHz, -40°C~+85°C, 12pF, ±10PPM", Frequency Tolerance="±10ppm max", Load Capacitance(CL)=12.0pF, Manufacturer=SJK, Operating Temperature Range="-40 °C to +85°C", Package size (L×W×H)="3.2×2.5×0.70 mm", Shunt Capacitance="3.0 pF Max", Frequency Range=12.0000000MHz, Mode=AT/Fundamental

## Free pads (board coordinates)
  round 125.98 hole 78.74: 6(102.36,102.36) 7(1787.4,102.36) 8(1787.4,1141.73)

## Via types
v1: diameter 16, hole 8, Top Layer to Bottom Layer, 134 vias
v2: diameter 20, hole 12, Top Layer to Bottom Layer, 21 vias
v3: diameter 19.68, hole 7.87, Top Layer to Bottom Layer, 6 vias

## Nets (pads, with @x,y where several pads share a name; then routed paths per layer and width w, separated by ;. In a path a pad name is that pad's centre, name@x,y a point inside that pad or via, vN(x,y) a via of type N, cw(c..) or ccw(c..) an arc to the next point about the centre after c; other vN are vias at no path point)
ADC_V: ADC_V.1 R12.1 U1.10 | length 2356.2
  Top Layer w8: U1.10 1601.85,628.9 1678.47,705.51 1712.49,705.51 1759.68,658.33 1809.68,658.33 1842,626 ADC_V.1 v1(1842,290.28)
  Bottom Layer w8: R12.1 483.83,805.46 483.83,802.17 767,519 767,472 861,378 1052.24,378 1167.24,263 1814.72,263 v1(1842,290.28)
BAT+: BAT+.1 C17.2 J3.1 P7.1 R10.2 U4.5 | length 378.4
  Top Layer w20: v2(49,608) BAT+.1 J3.1 ; C17.2 P7.1 343.5,211.77 U4.5
  Bottom Layer w8: v1(429,758.82) R10.2
GDO0: GDO0.1 U1.13 U3.6 | length 797.1
  Top Layer w8: U1.13 1468.27,720 1470.03,721.76 1481.49,721.76 GDO0.1 1648.93,889.2 1648.93,1297.25 1601.18,1345 U3.6
GDO2: GDO2.1 U1.14 U3.5 | length 733.4
  Top Layer w8: U1.14 1448.58,867.58 GDO2.1 1626,1045 1626,1276.62 1607.62,1295 U3.5
GND: C1.1 C2.1 C3.1 C4.1 C5.1 C6.1 C7.1 C8.1 C9.1 C10.1 C11.1 C12.1 C13.2 C14.2 C15.2 C16.1 C17.1 C18.2 C19.1 C20.1 P1.6 P2.1 P3.1 P5.4 P6.2 P7.2 P8.6 pad.6 pad.7 pad.8 Q2.E Q3.E Q4.E Q6.E R6.2 R13.1 R15.1 R18.1 R19.1 R23.1 S1.3 S1.4 U1.8 U1.23 U1.35 U1.47 U2.3 U2.5 U2.10 U2.12 U2.13 U2.16 U3.1 U3.12 U3.14 U3.15 U3.16 U4.1 U4.3 U4.9 U5.2 | length 3024.9
  Top Layer w8: R15.1 90.49,1465.64 v1(104.09,1452.05) ; v1(645,895) C14.2 ; v1(676.99,815) 706.99,845 C13.2 ; v1(680,740) U2.3 ; v1(748.33,635) U2.5 ; U2.16 780.31,822.06 785,826.75 v1(785,830) ; U2.10 v1(944.88,720.31) ; U2.12 899.69,759.69 v1(919.38,779.38) U2.13 ; C15.2 v1(899.53,845) ; v1@1119.92,440.08 1150.95,471.1 U1.35@1200.23,471.1 ; v1(1120,440) 1120,439.92 1153.37,406.55 1153.37,404.58 1159.21,398.74 C9.1 ; C8.1 v2(1190,801.39) 1237.99,801.39 1271.42,767.96 U1.23 ; R23.1 v1(1214,1981.72) ; v1(1327,1888) 1345.28,1869.72 1356.59,1869.72 1364.4,1861.91 Q6.E ; R6.2 1444.33,282.28 C6.1@1448.58,278.03 ; U1.47 C6.1 C6.1@1448.58,278.03 ; v1(1500,232.28) 1497.7,234.58 1492.03,234.58 C6.1@1448.58,278.03 ; U1.8 C12.1 C11.1 v2(1696.4,550.16) ; C1.1 v1(1586.19,287.61) C2.1 ; C3.1 v1(1642.42,50) ; C5.1 v1(1740,310)
  Top Layer w16: v2(49,373.74) U4.3 ; R19.1 v2(49,523.9) ; C20.1 96.99,728.16 98.83,730 v2(140,730) U5.2 ; U4.1 v2(128.94,544) C18.2 ; C17.1 259.84,173.13 265.75,179.04 P7.2 ; C19.1 v2(380.15,728.03) ; R18.1 v2(725,523.32)
  Top Layer w20: v1(197,1212.52) U3.16 ; U3.15 v1(271.08,1346) ; v1(271.08,1395) U3.14 ; v2(832.4,1936.44) Q4.E ; Q3.E v2(1370,2042.32) ; v1(1530.92,1058) U3.1 ; U3.12 v1(1530.92,1685)
  Bottom Layer w8: v1(389,941.66) C10.1 473.06,941.66 R13.1 ; v1(1289.6,1817.4) Q2.E ; S1.3 v1(1452.76,2292.06) S1.4 ; v1(1452.76,2018.44) C4.1
  other v1: 188,861.05 919.38,895 296.87,941.05 619,968.05 969,968.05 1189.55,968.05 339.36,991.97 493,991.97 791.4,991.97 1047.25,991.97 199,1010.11 104.09,1121.05 236,1126.05 104.09,1258.57 1787.4,1296.05 171.23,1308.19 229,1372.05 197,1405.05 1787.4,1406.05 188,1452.05 129.49,1487.48 168.49,1487.48 1787.4,1516.05 101,1570 149,1570 197,1570 243,1585 104,1686.05 204,1691.05 1262,1733 732.21,1762.89 564,1766.05 341.36,1781.05 104.09,1806.05 232.22,1806.05 441.36,1827.09 659,1841.05 834,1841.05 1124,1851.05 341.36,1881.05 1552,1888 534,1896.05 234,1941.05 465,1947 624,1956.05 104,1971.05 380.36,1992.33 1044,1992.33 552,2019.45 219,2041.05 104.09,2076.05 1583,2087.45 299,2088.37 419.36,2093.29 1054,2134.42 216.72,2141.05 559,2153.33 1483,2164.45 449,2166.05 104.09,2176.95 1601,2219.45 709,2276.05 1683,2309.45 796.83,2322.09
  other v3: 214.57,355.43 257.87,355.43 214.57,398.74 257.87,398.74 214.57,442.05 257.87,442.05
I2C_SCL: P3.6 U1.42 | length 2047
  Top Layer w8: U1.42 1350.16,453.33 1364.99,468.16 1364.99,636.66 1357,644.65 v1(1357,667)
  Bottom Layer w8: v1(1357,667) 1357,686 1628,957 1628,2100.44 P3.6
I2C_SDA: P3.5 U1.43 | length 1932.2
  Top Layer w8: U1.43 1369.84,444.1 1382.99,457.24 v1(1383,667)
  Bottom Layer w8: v1(1383,667) 1383,684.39 1646,947.39 1646,2018.44 P3.5
INT1: INT1.1 U1.18 U2.11 | length 690.6
  Top Layer w8: U2.11 930,740 INT1.1 1070,880 1291.1,880 1369.84,801.26 U1.18
INT2: INT2.1 U1.19 U2.9 | length 677.5
  Top Layer w8: U2.9 856.11,700.62 857.03,699.7 857.03,696.94 861.71,692.25 952.25,692.25 INT2.1 1122,862 1283.65,862 1350.16,795.49 U1.19
LED1: R7.1 U1.29 | length 1530
  Top Layer w8: v1(1120,580) 1129.53,589.53 U1.29 ; v1(1120,1645) 1165,1690 R7.1
  Bottom Layer w8: v1(1120,580) v1(1120,1645)
LED2: R21.1 U1.32 | length 1651.6
  Top Layer w8: R21.1@757.83,1946.05 757.83,1806.7 v1@889.77,1674.77 ; v1(1095,546.33) 1110.86,530.47 U1.32
  Bottom Layer w8: v1(890,1675) 1095,1470 v1(1095,546.33)
LED_GREEN: R11.1 U1.33 | length 1491
  Top Layer w8: v1(1109,505.51) 1114.28,510.79 U1.33 ; v1(1190,1570.84) 1336,1716.84 v1(1336,1718)
  Bottom Layer w8: v1(1109,505.51) 1190,586.51 1190,740 1150.55,779.45 1150.55,1531.39 v1(1190,1570.84) ; v1(1336,1718) 1364.4,1746.4 R11.1
LPUART1_RX: R3.1 U1.22 | length 210.7
  Top Layer w8: U1.22 1291.1,632.01 v1(1332.44,590.67)
  Bottom Layer w8: v1(1332.44,590.67) R3.1
LPUART1_TX: R4.1 U1.21 | length 158.3
  Top Layer w8: U1.21 1310.79,656.65 v1(1332.44,635)
  Bottom Layer w8: v1(1332.44,635) R4.1
NetC1_2: C1.2 U1.3 Y1.1 | length 250.7
  Top Layer w8: U1.3 1580.38,491.1 1586.19,485.3 1592.47,479.02 1594.81,476.67 1594.81,455.72 1565.58,426.49 Y1.1 1565.58,342.56 1557.81,334.79 1555.84,334.79 1550,328.95 C1.2
NetC2_2: C2.2 U1.4 Y1.2 | length 266.5
  Top Layer w8: U1.4@1519.45,510.95 1585.99,510.95 1624.63,472.31 Y1.2 C2.2
NetC3_2: C3.2 U1.5 YA1.1 | length 736.9
  Top Layer w8: U1.5@1519.45,530.41 1591.99,530.41 1665,457.4 1665,263.06 1616.96,215.02 1534.2,215.02 1505.48,186.3 1505.48,121.73 1520.93,106.28 1552.18,106.28 YA1.1 C3.2
NetC5_2: C5.2 R8.1 YA1.3 | length 159.1
  Top Layer w8: YA1.3 1642.42,215.02 1669.68,242.28 R8.1 1738.03,242.28 C5.2
NetC10_2: C10.2 R10.1 R12.2 R13.2 | length 150.6
  Bottom Layer w8: R10.1 R12.2 R13.2 C10.2
NetC20_2: C20.2 J2.2 J3.2 U5.1 U5.3 U5_VIN.1 | length 407.1
  Top Layer w8: U5.3 200.22,699.6 222.29,699.6 243,720.31 243,741.88 224.33,760.55 200.08,760.55 U5.1
  Top Layer w20: J3.2 C20.2 ; J2.2 C20.2 ; U5.1 C20.2
NetC21_2: C21.2 Q5.1 Q6.C R14.1 | length 262.7
  Top Layer w8: Q6.C 1405.5,1947.35 1448.76,1904.09 ; Q5.1 1448.76,1904.09 ; C21.2 R14.1 1448.76,1904.09
NetD1_A: D1.A R9.1 | length 96
  Bottom Layer w8: R9.1 1451,1832.87 D1.A
NetD1_K: D1.K Q2.C | length 128
  Bottom Layer w8: Q2.C 1441.4,1951.6 D1.K
NetD2_A: D2.A D3.A R17.2 | length 164.1
  Bottom Layer w10: R17.2 150.44,695.56 168.15,677.85 D2.A D3.A
NetD2_K: D2.K U4.6 | length 528.1
  Top Layer w10: U4.6 v1(429,373.74)
  Bottom Layer w10: D2.K 380.15,677.85 429,629 v1(429,373.74)
NetD3_K: D3.K U4.7 | length 341.7
  Top Layer w10: U4.7 v1(398,423.74)
  Bottom Layer w10: D3.K 364.02,593.98 398,560 v1@398,423
NetD4_2: D4.2 Q1.1 R16.2 R18.2 | length 292.6
  Top Layer w20: Q1.1@521,588.76 D4.2 521.06,494.71 592.28,494.71 613.99,472.99 627.38,472.99 R16.2 R18.2
NetJ1_1: J1.1 L2.2 | length 149.9
  Top Layer w20: J1.1 L2.2
NetL1_1: L1.1 U3.13 | length 91.4
  Top Layer w8: L1.1 U3.13
NetL1_2: L1.2 L2.1 R15.2 | length 100.6
  Top Layer w8: R15.2 L1.2
  Top Layer w20: L2.1 R15.2
NetP1_2: P1.2 R4.2 | length 425.3
  Bottom Layer w8: R4.2 1616.89,635 P1.2
NetP1_3: P1.3 R3.2 | length 402.3
  Bottom Layer w8: R3.2 1672.56,590.67 P1.3
NetP1_4: P1.4 R2.1 | length 379.2
  Bottom Layer w8: R2.1 1658.64,546.33 1717.82,605.51 P1.4
NetP1_5: P1.5 R1.2 | length 356.1
  Bottom Layer w8: R1.2 1783.89,502 P1.5
NetP4_1: P4.1 R5.1 | length 140.1
  Top Layer w16: R5.1 1165,2204.37 P4.1
NetP4_2: P4.2 Q3.C | length 128.9
  Top Layer w16: Q3.C P4.2
NetP5_1: P5.1 R16.1 VIN.1 | length 511
  Top Layer w20: R16.1 v2(775,345.2)
  Bottom Layer w20: v2(775,345.2) 1013.8,345.2 1074.8,284.2 P5.1
NetP9_1: P9.1 R20.1 | length 264
  Top Layer w16: R20.1 807.13,2259.84 P9.1
NetP9_2: P9.2 Q4.C | length 230.8
  Top Layer w16: Q4.C 855.91,2130.91 954.72,2229.72 P9.2
NetQ2_B: Q2.B R11.2 | length 63.3
  Bottom Layer w8: R11.2 Q2.B
NetQ3_B: Q3.B R7.2 | length 67.3
  Top Layer w8: R7.2 Q3.B
NetQ4_B: Q4.B R21.2 | length 60.6
  Top Layer w8: R21.2 Q4.B
NetQ6_B: Q6.B R22.2 R23.2 | length 124.1
  Top Layer w8: R23.2 R22.2 Q6.B
NetR6_1: R6.1 U1.44 | length 82.8
  Top Layer w8: R6.1 U1.44
NetR8_2: R8.2 U1.6 | length 393.4
  Top Layer w8: U1.6 1598.2,550.16 1700,448.36 R8.2
NetR19_2: R19.2 U4.2 | length 79.9
  Top Layer w16: R19.2 U4.2
NRST: C4.2 P2.5 S1.1 S1.2 U1.7 | length 3499
  Top Layer w8: U1.7 1603.97,569.84 1729,444.81 v1(1729,396) ; v1(1596,1817.4) v1(1787.4,1626)
  Bottom Layer w8: P2.5 958.24,396 1061,396 1172.8,284.2 1501.59,284.2 1543.39,326 1659,326 v1(1729,396) 1729,418 1765,454 1805.84,454 1867,515.16 1867,1546.4 v1(1787.4,1626) ; S1.1 1340.55,2146.39 1354.27,2132.68 1354.27,2130.71 1395.29,2089.68 C4.2 1508.32,2089.68 ; S1.2 1564.96,2146.39 1551.24,2132.68 1551.24,2130.71 1510.22,2089.68 1508.32,2089.68 ; v1(1596,1817.4) 1596,2002 1508.32,2089.68
PA15: P8.2 R22.1 U1.38 | length 2891.5
  Top Layer w8: v1(1180,1630) 1214,1664 R22.1 ; v1(1255,317.72) 1271.42,334.13 U1.38
  Bottom Layer w8: P8.2 410.2,2052 778.63,2052 902.41,1928.22 903.16,1928.22 1023,1808.38 1023,1787 v1(1180,1630) 1223,1587 1223,482.7 1255,450.7 v1(1255,317.72)
PB3: P8.3 U1.39 | length 2607.1
  Top Layer w8: v1(1291.1,317.72) U1.39
  Bottom Layer w8: P8.3 492.2,2070 786.84,2070 1241,1615.84 1241,490.16 1291.1,440.06 v1(1291.1,317.72)
PB4: P8.4 U1.40 | length 2364.1
  Top Layer w8: v1@1298.39,468.55 1310.34,456.61 U1.40@1310.34,401
  Bottom Layer w8: P8.4 574.2,2088 794.29,2088 1259,1623.29 1259,507.16 v1(1298,468.16)
PB5: P8.5 U1.41 | length 2287.6
  Top Layer w8: U1.41 v1(1330.47,468.16)
  Bottom Layer w8: P8.5 656.2,2106 801.75,2106 1277,1630.75 1277,521.63 v1(1330.47,468.16)
PB8: P3.4 U1.45 | length 1816.1
  Top Layer w8: v1(1409,667) 1409.21,666.79 U1.45
  Bottom Layer w8: v1(1409,667) 1409,683 1664,938 1664,1936.44 P3.4
PB9: P3.3 U1.46 | length 1707.8
  Top Layer w8: U1.46 1428.9,622.8 1435,628.9 v1(1435,667)
  Bottom Layer w8: v1(1435,667) 1435,682 1682,929 1682,1854.44 P3.3
PC13: P3.2 U1.2 | length 1577.6
  Top Layer w8: v1(1461,667) 1461,479.02 1468.6,471.42 U1.2
  Bottom Layer w8: v1(1461,667) 1702,908 1702,1774.56 P3.2@1787.28,1859.84
RX_EN: RX_EN.1 U1.20 U3.9 | length 1044
  Top Layer w8: v1(1310.79,1399) 1406.79,1495 U3.9 RX_EN.1 ; v1(1311,801.39) 1311,801.17 1330.47,781.7 U1.20
  Bottom Layer w8: v1(1310.79,1399) 1310.89,1398.89 1310.89,801.49 v1(1311,801.39)
SOLAR+: P6.1 Q1.3 SOLAR+.1 | length 1287.9
  Top Layer w20: Q1.3 SOLAR+.1 v1(558.4,818)
  Bottom Layer w20: v1(558.4,818) 558.4,1424.54 P6.1
SPI1_CS: CS1.1 U1.12 U3.7 | length 894.5
  Top Layer w8: U1.12 1519.45,707.9 CS1.1 1666.93,855.38 1666.93,1345 1616.93,1395 U3.7
SPI1_MISO: MISO1.1 U1.16 U3.4 | length 643
  Top Layer w8: U1.16 1409.21,842.58 1389.53,862.26 MISO1.1 1389.53,1190.2 1444.33,1245 U3.4
SPI1_MOSI: MOSI1.1 U1.17 U3.2 | length 622.6
  Top Layer w8: v1(1350.16,1145) 1350.16,959.47 MOSI1.1 1350.16,850 1389.53,810.63 U1.17 ; v1(1461,1145) U3.2
  Bottom Layer w8: v1(1350.16,1145) v1(1461,1145)
SPI1_SCLK: SCLK1.1 U1.15 U3.3 | length 558.8
  Top Layer w8: U1.15 SCLK1.1 1428.9,1162.9 1461,1195 U3.3
SPI2_CS: CS2.1 U1.25 U2.8 | length 417.2
  Top Layer w8: U2.8 819.69,687.84 839.26,668.27 962.56,668.27 994.29,700 CS2.1 1088.25,700 1119.98,668.27 U1.25
SPI2_MISO: MISO2.1 U1.27 U2.7 | length 438.7
  Top Layer w8: U2.7 800,667.81 838.91,628.9 880,628.9 U1.27
SPI2_MOSI: MOSI2.1 U1.28 U2.6 | length 482.5
  Top Layer w8: U2.6 780.31,662.04 848.37,593.98 MOSI2.1 970,593.98 985.23,609.21 U1.28
SPI2_SCLK: SCLK2.1 U1.26 U2.4 | length 623
  Top Layer w8: v1@685,660 685,685 720.31,720.31 U2.4 ; v1(1067.75,658.33) 1067.75,657.58 1076.43,648.9 1200.24,648.9 U1.26
  Bottom Layer w8: v1(685,658.33) 741.8,658.33 v1(1067.75,658.33)
SWCLK: P2.3 P5.3 U1.37 | length 643.8
  Top Layer w8: P5.3 959.57,290.28 ; P2.3 968.66,477.64 959.57,468.55 959.57,345.2 959.57,290.28 ; U1.37 1251.73,355.43 1186.57,290.28 959.57,290.28
SWDIO: P2.2 P5.2 U1.34 | length 477.9
  Top Layer w8: v1(988.19,317.2) 988.19,351.68 1076.43,439.92 ; P2.2 1017.87,464.17 1042.13,439.92 1076.43,439.92 ; U1.34 1127.62,491.1 1076.43,439.92
  Bottom Layer w8: P5.2 v1(988.19,317.2)
TX_EN: TX_EN.1 U1.11 U3.8 | length 1018.2
  Top Layer w8: U1.11 1563.95,648.58 TX_EN.1 1685,769.63 1685,1399 1639,1445 U3.8
USART1_RX: R1.1 U1.31 | length 216.7
  Top Layer w8: U1.31 1284.28,550.16 v1(1332.44,502)
  Bottom Layer w8: v1(1332.44,502) R1.1
USART1_TX: R2.2 U1.30 | length 206.5
  Top Layer w8: U1.30 1308.93,569.84 v1(1332.44,546.33)
  Bottom Layer w8: v1(1332.44,546.33) R2.2
VCC: C18.1 D4.1 Q1.2 R17.1 U4.4 U4.8 | length 420.9
  Top Layer w20: v2(128.94,270) U4.4 ; C18.1 v2(343.5,544) U4.8 ; v2(429,270) 453.71,270 D4.1 ; Q1.2@595.8,588.76 v2(641,588.76)
  Bottom Layer w20: v2(128.94,608) R17.1
VCC_3V: C6.2 C7.2 C8.2 C9.2 C11.2 C12.2 C13.1 C14.1 C15.1 C16.2 C19.2 C21.1 P2.6 Q5.2 R5.2 R9.2 R14.2 R20.2 U1.1 U1.9 U1.24 U1.36 U1.48 U2.1 U2.14 U5.5 VCC_3V.1 | length 1627.9
  Top Layer w8: U2.1 C13.1 C14.1 v1(748.33,939.69) ; U2.14 C15.1 C16.2 v1(819.69,939.69) ; v2(1150.55,719.45) U1.24 ; v1(1200.55,370) U1.36 ; U1.48 1487.95,380.87 C7.2 1503.7,314.25 C6.2 1503.7,278.03 1515.45,266.28 1517.42,266.28 1542.17,241.53 1548.47,241.53 v1(1550,240) ; R14.2 1483,2006 1495.44,2018.44 v1(1530.92,2018.44) C21.1 ; C6.2@1517.21,293.51 1517.21,451.73 U1.1 ; U1.9 1610.52,609.21 1630.21,628.9 C12.2 C11.2 v1(1696.4,678.27)
  Top Layer w20: U5.5 C19.2 ; C19.2@343.5,769.21 VCC_3V.1 v2(343.5,890) ; v1(690,2018.44) R20.2 ; v2(1120,2107.28) R5.2 ; Q5.2 1483,1768.35 v2(1483,1762.89)
  Bottom Layer w8: v1@1417.85,1722.15 R9.2
  other v1: 1417.85,1722
VCC_5V: J2.1 P1.1 P8.1 | length 62.9
  Top Layer w20: J2.1 v1(96.99,1000)
VCC_CC1101: Q5.3 U3.11 VCC_CC1101.1 | length 341.5
  Top Layer w20: U3.11 1595.91,1595 1607.62,1606.72 1607.62,1721.38 1543.24,1785.76 Q5.3
pads on no net: J1.2 P2.4 U2.2 U2.15 U3.10 U5.4 YA1.2 YA1.4

## Polygon pours and split planes (outlines as drawn)
GND on Bottom Layer "Bottom Layer-GND" (solid, remove dead copper, pour order 6): -236.22,0 1889.76,0 1889.76,2362.2 -236.22,2362.2
GND on Top Layer "Top Layer-GND" (solid, remove dead copper, pour order 4): -236.22,0 1889.76,0 1889.76,2362.2 -236.22,2362.2
BAT+ on POWER Plane (split plane): 660.53,784.63 664.96,783.57 669.16,781.83 673.04,779.45 676.5,776.5 679.45,773.04 681.83,769.16 683.57,764.96 684.63,760.53 684.96,756.31 684.9,756 684.9,674 684.96,673.69 684.63,669.47 683.57,665.04 681.83,660.84 679.45,656.96 676.5,653.5 673.04,650.55 669.16,648.17 664.96,646.43 660.53,645.37 656.51,645.05 656.11,645.08 656,645.1 114,645.1 113.89,645.08 108.9,644.75 103.88,643.75 99.04,642.11 94.46,639.85 90.21,637.01 86.36,633.64 82.99,629.79 80.15,625.54 77.89,620.96 76.25,616.12 75.25,611.1 74.92,606.11 74.9,606 74.9,270 74.92,269.89 75.25,264.9 76.25,259.88 77.89,255.04 80.15,250.46 82.99,246.21 86.36,242.36 90.21,238.99 94.46,236.15 99.04,233.89 103.88,232.25 108.9,231.25 113.89,230.92 114,230.9 413.35,230.9 413.15,230.68 409.05,225.16 405.51,219.26 402.57,213.04 400.26,206.56 398.59,199.89 397.58,193.09 397.25,186.47 397.23,186.22 397.23,50 397.28,49.5 396.95,45.31 395.85,40.73 394.05,36.38 391.59,32.37 388.53,28.79 384.95,25.74 380.94,23.28 376.59,21.48 372.01,20.38 367.83,20.05 367.32,20.1 50,20.1 49.5,20.05 45.31,20.38 40.73,21.48 36.38,23.28 32.37,25.74 28.79,28.79 25.74,32.37 23.28,36.38 21.48,40.73 20.38,45.31 20.05,49.5 20.1,50 20.1,740 20.07,740.25 19.75,746.87 18.74,753.67 17.07,760.34 14.75,766.82 11.81,773.04 8.27,778.94 4.18,784.46 3.78,784.9 140,784.9 656,784.9 656.31,784.96
VCC_5V on POWER Plane (split plane): 1840,2341.99 1840.45,2342.03 1844.56,2341.71 1849.11,2340.62 1853.44,2338.82 1857.44,2336.37 1861.01,2333.33 1864.05,2329.76 1866.5,2325.77 1868.29,2321.44 1869.39,2316.88 1869.72,2312.64 1869.67,2312.09 1869.67,839.1 1776,839.1 1775.64,839.03 1770.13,839.39 1764.35,840.54 1758.78,842.43 1753.5,845.03 1748.61,848.3 1744.18,852.18 1740.3,856.61 1737.03,861.5 1734.43,866.78 1732.54,872.35 1731.39,878.13 1731.03,883.64 1731.1,884 1731.1,2160 1731.08,2160.08 1730.74,2166.17 1729.71,2172.26 1728,2178.19 1725.63,2183.9 1722.64,2189.31 1719.07,2194.35 1714.95,2198.95 1710.35,2203.07 1705.31,2206.64 1699.9,2209.63 1694.19,2212 1688.26,2213.71 1682.17,2214.74 1676.08,2215.08 1676,2215.1 190,2215.1 189.92,2215.08 183.83,2214.74 177.74,2213.71 171.81,2212 166.1,2209.63 160.69,2206.64 155.65,2203.07 151.05,2198.95 146.93,2194.35 143.36,2189.31 140.37,2183.9 138,2178.19 136.29,2172.26 135.26,2166.17 134.92,2160.08 134.9,2160 134.9,795.1 70,795.1 70,2342.11 1838.8,2342.11
VCC_3V on POWER Plane (split plane): 184 vertices, not listed, extent 145.03,20.05 1869.72,2204.97
VCC on POWER Plane (split plane): 114,634.9 656,634.9 656.11,634.92 656.51,634.95 660.53,634.63 664.96,633.57 669.16,631.83 673.04,629.45 676.5,626.5 679.45,623.04 681.83,619.16 683.57,614.96 684.63,610.53 684.96,606.31 684.9,606 684.9,256.32 467.32,256.32 467.07,256.29 460.45,255.97 453.65,254.96 446.98,253.29 440.5,250.97 434.29,248.03 428.39,244.49 423.81,241.1 114,241.1 113.69,241.04 109.47,241.37 105.04,242.43 100.84,244.17 96.96,246.55 93.5,249.5 90.55,252.96 88.17,256.84 86.43,261.04 85.37,265.47 85.04,269.69 85.1,270 85.1,606 85.04,606.31 85.37,610.53 86.43,614.96 88.17,619.16 90.55,623.04 93.5,626.5 96.96,629.45 100.84,631.83 105.04,633.57 109.47,634.63 113.69,634.96
GND on GND Plane (split plane): 176 vertices, not listed, extent -0.85,20.05 1869.72,2342.11

## Keep-outs
Keep-Out Layer:
  lines w10: 1840,2362.09 cw(c1839.88,2312.2) 1889.76,2312.09 1889.76,50 cw(c1839.76,50) 1839.76,0 1522.44,0 cw(c1522.44,50) 1472.44,50 1472.44,186.22 ccw(c1422.44,186.22) 1422.44,236.22 1158.27,236.22 ccw(c1158.27,186.22) 1108.27,186.22 cw(c1083.27,186.22) 1083.27,161.22 806.5,161.22 cw(c806.5,186.22) 781.5,186.22 ccw(c731.5,186.22) 731.5,236.22 467.32,236.22 ccw(c467.32,186.22) 417.32,186.22 417.32,50 cw(c367.32,50) 367.32,0 50,0 cw(c50,50) 0,50 0,740 ccw(c-50,740) -50,790 -186.22,790 cw(c-186.22,840) -236.22,840 -236.22,2312.2 cw(c-186.22,2312.2) -186.22,2362.2 1840,2362.2

## Other copper
Top Layer:
  pour cut-out: 65.09,1540 224.4,1540 cw(c196.37,1527.5) 224.4,1515 65.09,1515
  pour cut-out: -236.22,2362.2 -236.22,789.52 70,790.05 70,2362 -236.02,2362
Bottom Layer:
  pour cut-out: -236.22,2362.2 -236.22,789.52 70,790.05 70,2362 -236.02,2362
GND Plane (plane layer: these items are gaps in the copper):
  pour cut-out: -236.22,2362.2 -236.22,789.52 70,790.05 70,2362 -236.02,2362
POWER Plane (plane layer: these items are gaps in the copper):
  pour cut-out: -236.22,2362.2 -236.22,789.52 70,790.05 70,2362 -236.02,2362
  pour cut-out: 249.08,390 223.36,390 223.36,363 249.08,363
  pour cut-out: 249.08,434 223.36,434 223.36,407 249.08,407
  lines w10: -50,790 656,790 cw(c656,756) 690,756 690,674 cw(c656,674) 656,640 ; 140,790 140,2160 cw(c190,2160) 190,2210 1676,2210 cw(c1676,2160) 1726,2160 1726,884 ccw(c1776,884) 1776,834 1890,834 ; 470,236 114,236 cw(c114,270) 80,270 80,606 cw(c114,606) 114,640 656,640 ; 690,236 690,606 ccw(c656,606) 656,640

## Silkscreen, mask and mechanical layers (free items; w line width, h text height)
Top Overlay:
  text "PA15" at 162.05,2323 h26
  text "PB3" at 279.78,2323 h26
  text "PB4" at 375.85,2323 h26
  text "PB5" at 471.93,2323 h26
  text "GND" at 568,2323 h26
  text "I2C_SCL" at 1553,2247.33 h26
  text "VCC_5V" at 28.72,2167.33 h26
  text "I2C_SDA" at 1553,2143 h26
  text "PB8" at 1652.63,2043 h26
  text "PB9" at 1652.63,1943 h26
  text "SOLAR" at 1114,1856 h26 r90
  text "PC13" at 1630.97,1843 h26
  text "RFID_CC1101 / 433MHz / Rev3.1 / 2022.4.8" at 70,1811.02 h40
  text "GND" at 1652.63,1743 h26
  text "VCC_5V" at 1877.43,858 h26 r90
  text "LTX" at 1877.43,748.69 h26 r90
  text "LRX" at 1877.43,639.38 h26 r90
  text "TX" at 1877.43,556.06 h26 r90
  text "RX" at 1877.43,472.74 h26 r90
  text "GND" at 1877.43,363.43 h26 r90
Bottom Overlay:
  text "BAT" at 180,190 h26
Drill Drawing:
  lines w10: 450.79,0 450.79,196.85 765.75,196.85 765.75,0 1123.03,0 ; 1124.02,0.98 1124.02,196.85 1438.98,196.85 1438.98,0 ; 1124.02,195.87 cw(c1125,195.87) 1125,196.85 ; 1889.76,0 ccw(c1889.76,0) 1889.76,0 ; 1889.76,0 ccw(c1889.76,0) 1889.76,0 ; 1889.76,0 ccw(c1889.76,0) 1889.76,0

## Dimensions
-236.02,2362 to 1889.76,2362.2 on Top Layer
-280,2362 to 0,0 on Top Layer
0,0 to 1889.76,0 on Top Layer

## Text inside footprints (layer, text, board x,y; h text height)
P2: Top Overlay "VREF" at 756.33,353.2 h26; Top Overlay "NRST" at 793,395 h26; Top Overlay "SWO" at 905.09,421 h26 r270; Top Overlay "SWCLK" at 951,395 h26; Top Overlay "SWDIO" at 996.19,353.2 h26
P5: Top Overlay "VCC" at 1040,292 h26; Top Overlay "DM" at 966,292 h26; Top Overlay "DP" at 880,292 h26; Top Overlay "GND" at 781,291 h26
U3: Top Overlay "E07-433M20S-V1.0" at 1136,1370 h35.43 r180; Top Overlay "ANT" at 419.9,1544.8 h27.56 r180; Top Overlay "GND" at 417.14,1461.73 h27.56 r180; Top Overlay "GND" at 417.54,1302.28 h27.56 r180; Top Overlay "GND" at 417.54,1223.54 h27.56 r180; Top Overlay "GND" at 1465.17,1658.19 h27.56 r180; Top Overlay "VCC" at 1465.17,1607.01 h27.56 r180; Top Overlay "NC" at 1465.17,1557.8 h27.56 r180; Top Overlay "RXEN" at 1465.17,1506.61 h27.56 r180; Top Overlay "TXEN" at 1465.17,1457.4 h27.56 r180; Top Overlay "CSN" at 1465.17,1404.25 h27.56 r180; Top Overlay "GDO0" at 1465.17,1357.01 h27.56 r180; Top Overlay "GDO2" at 1465.17,1305.83 h27.56 r180; Top Overlay "MISO" at 1465.17,1258.58 h27.56 r180; Top Overlay "SCK" at 1465.17,1207.4 h27.56 r180; Top Overlay "MOSI" at 1465.17,1158.19 h27.56 r180; Top Overlay "GND" at 1465.17,1108.98 h27.56 r180